# Altium PCB PCB.PcbDoc (part 1 of 3)
Units mm, origin at the board's own origin, x right, y up, seen from the top; angles counter-clockwise.
Board outline 68.58 x 53.34 mm, 4 copper layers (TOP, GND, SIG, BOTTOM), stack 1.586 mm thick; 257 components, 121 nets, 724 pads, 316 vias.
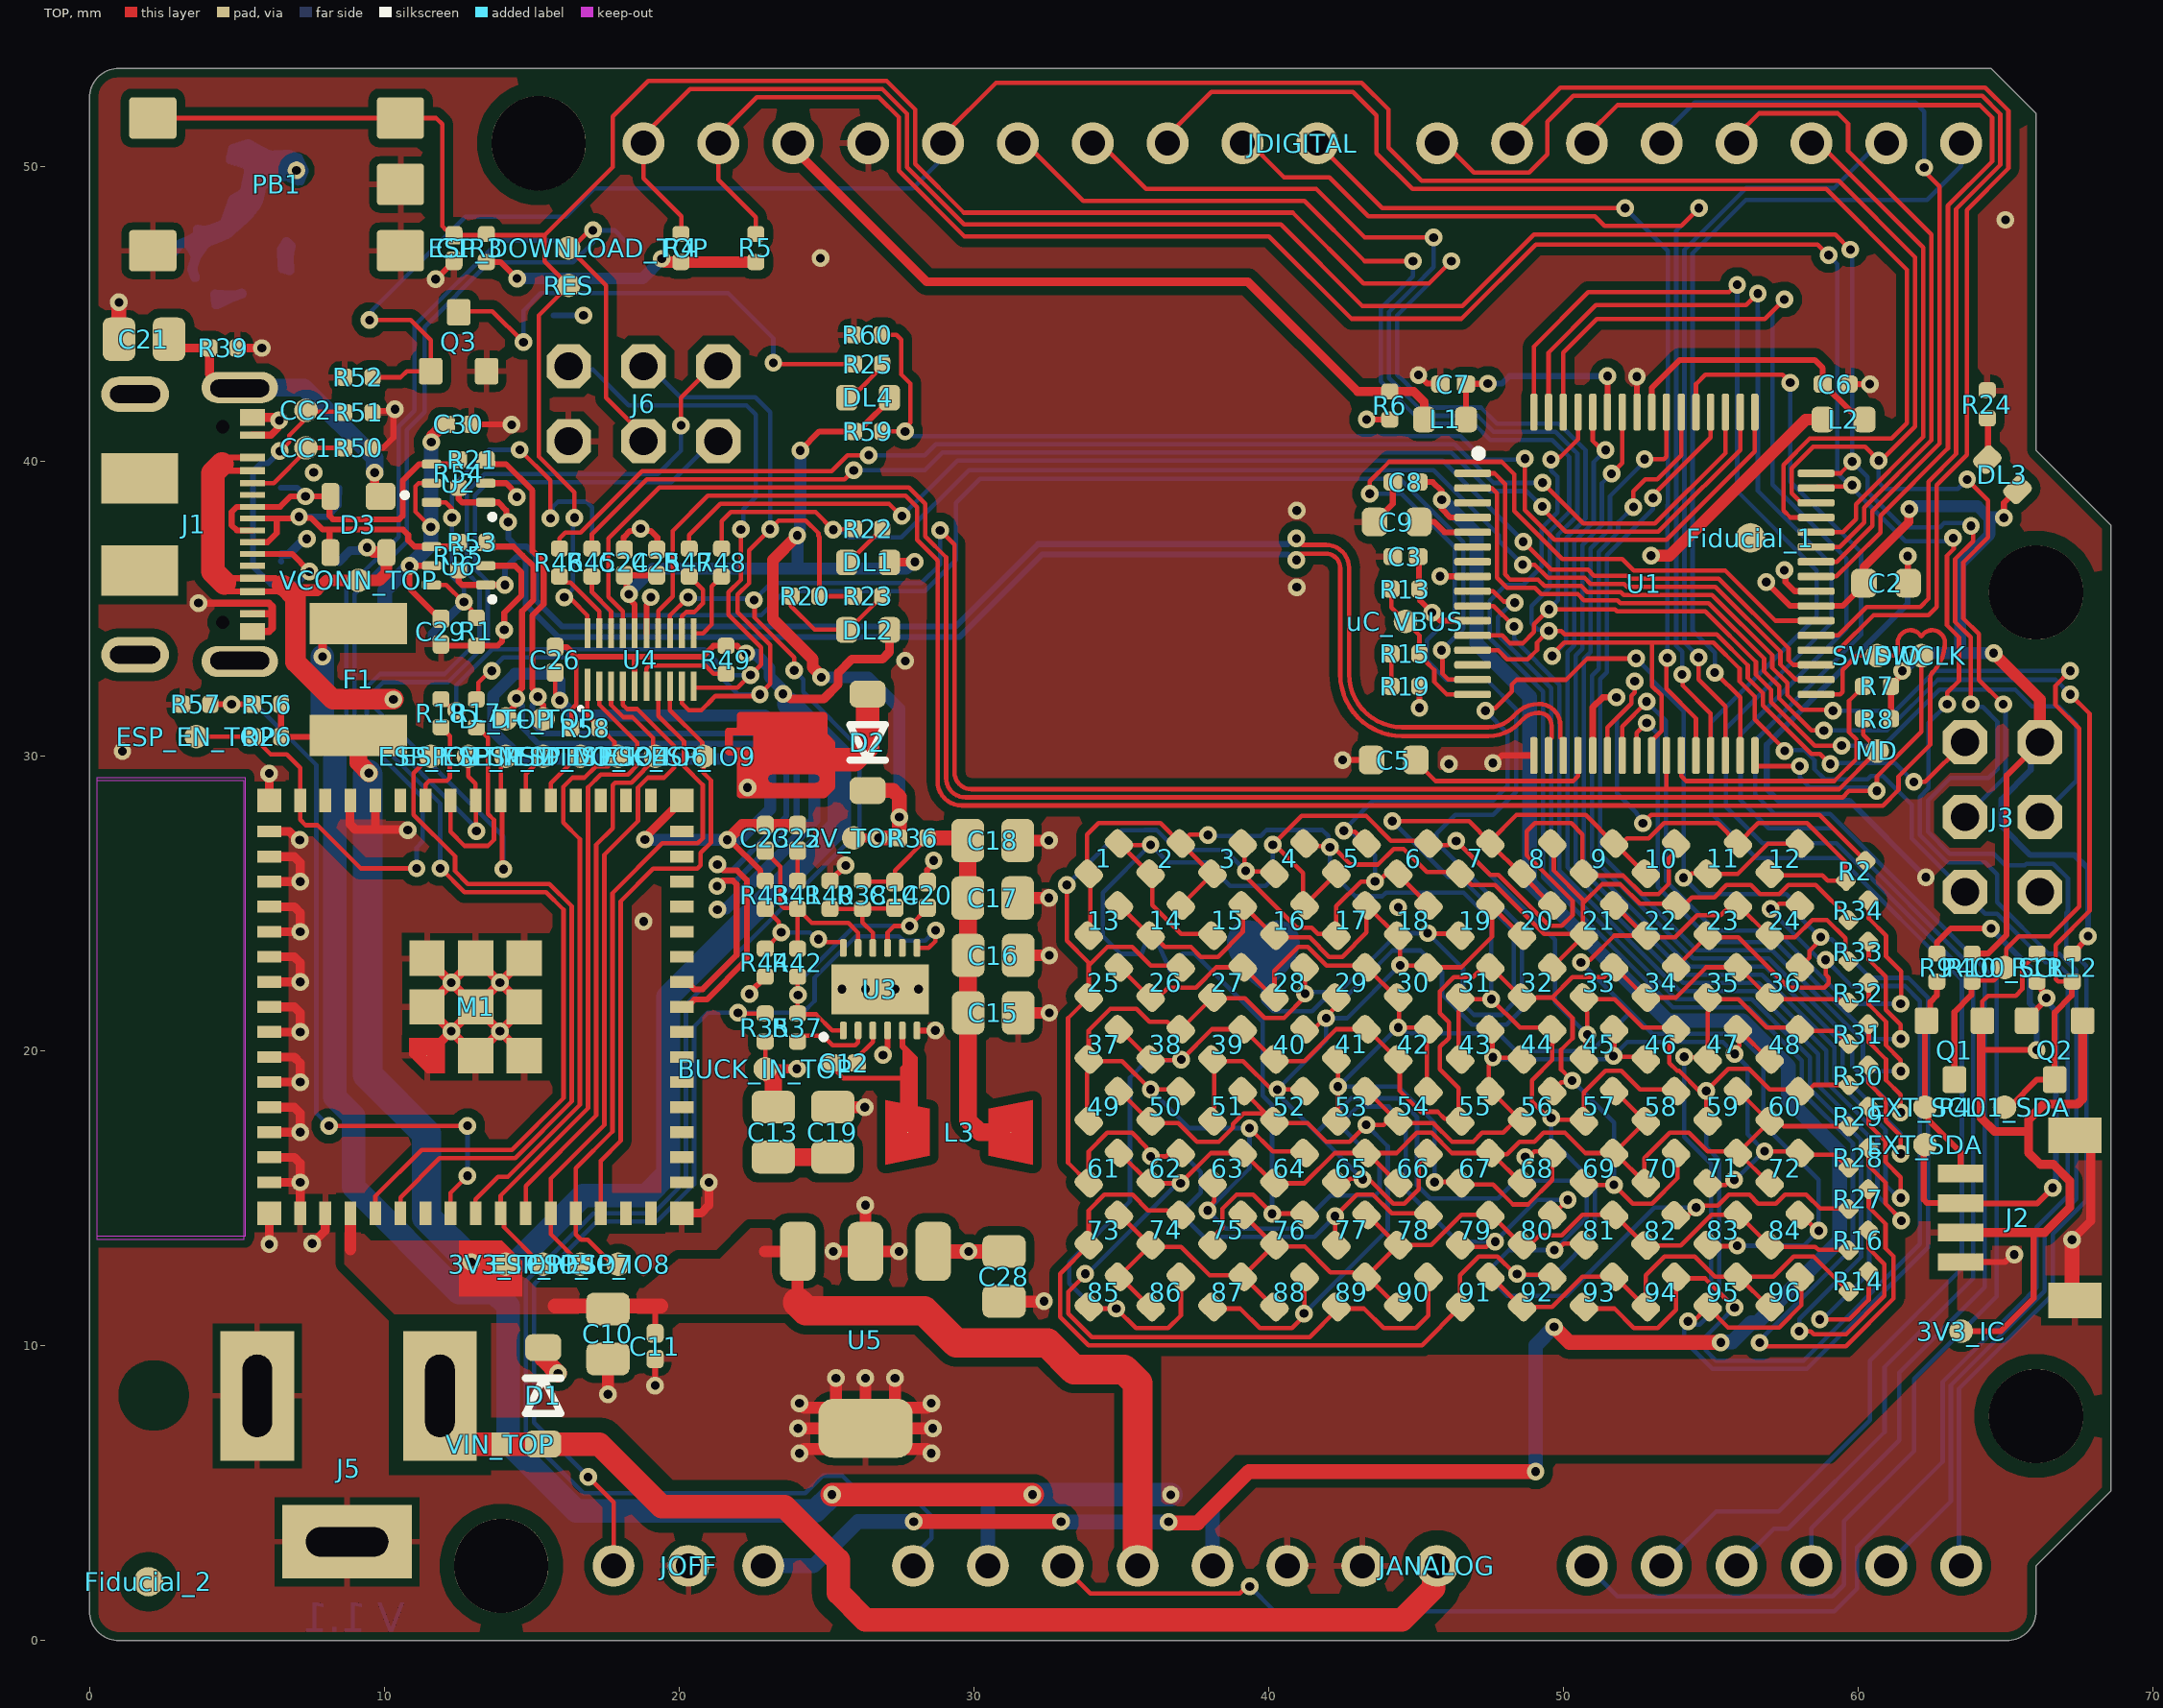
[diagram p0: TOP view]
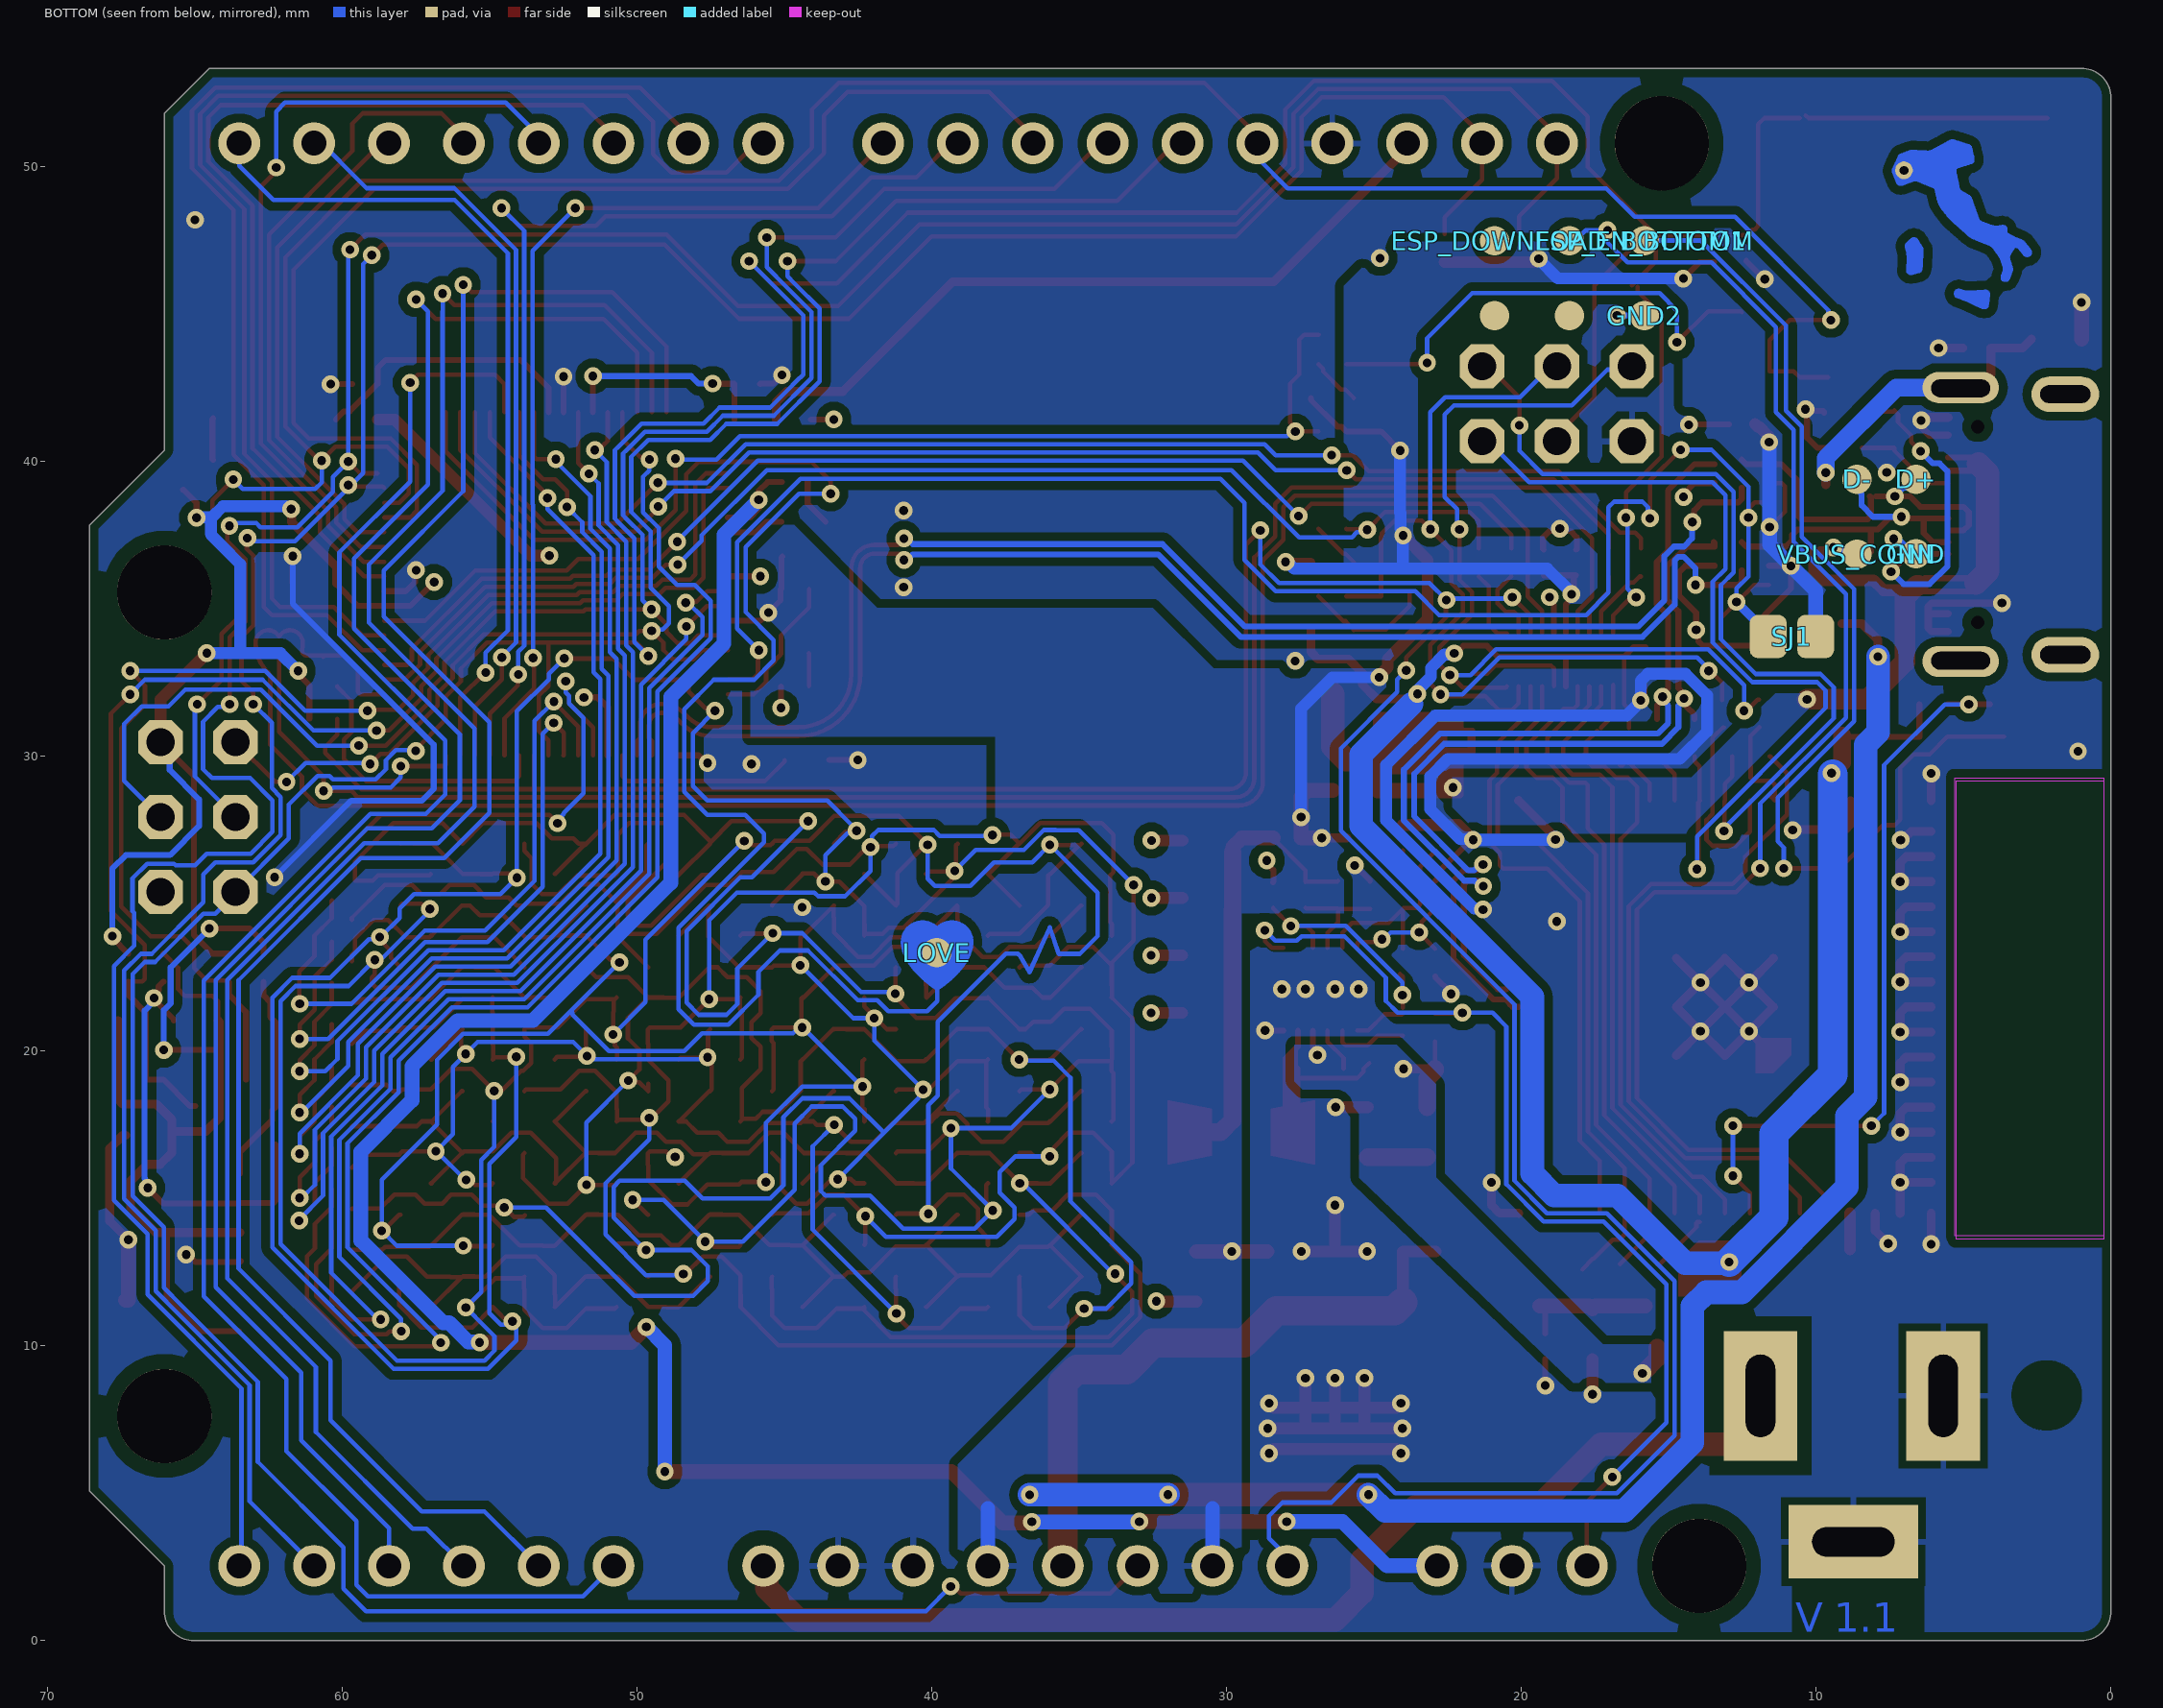
[diagram p1: BOTTOM view, seen from below]
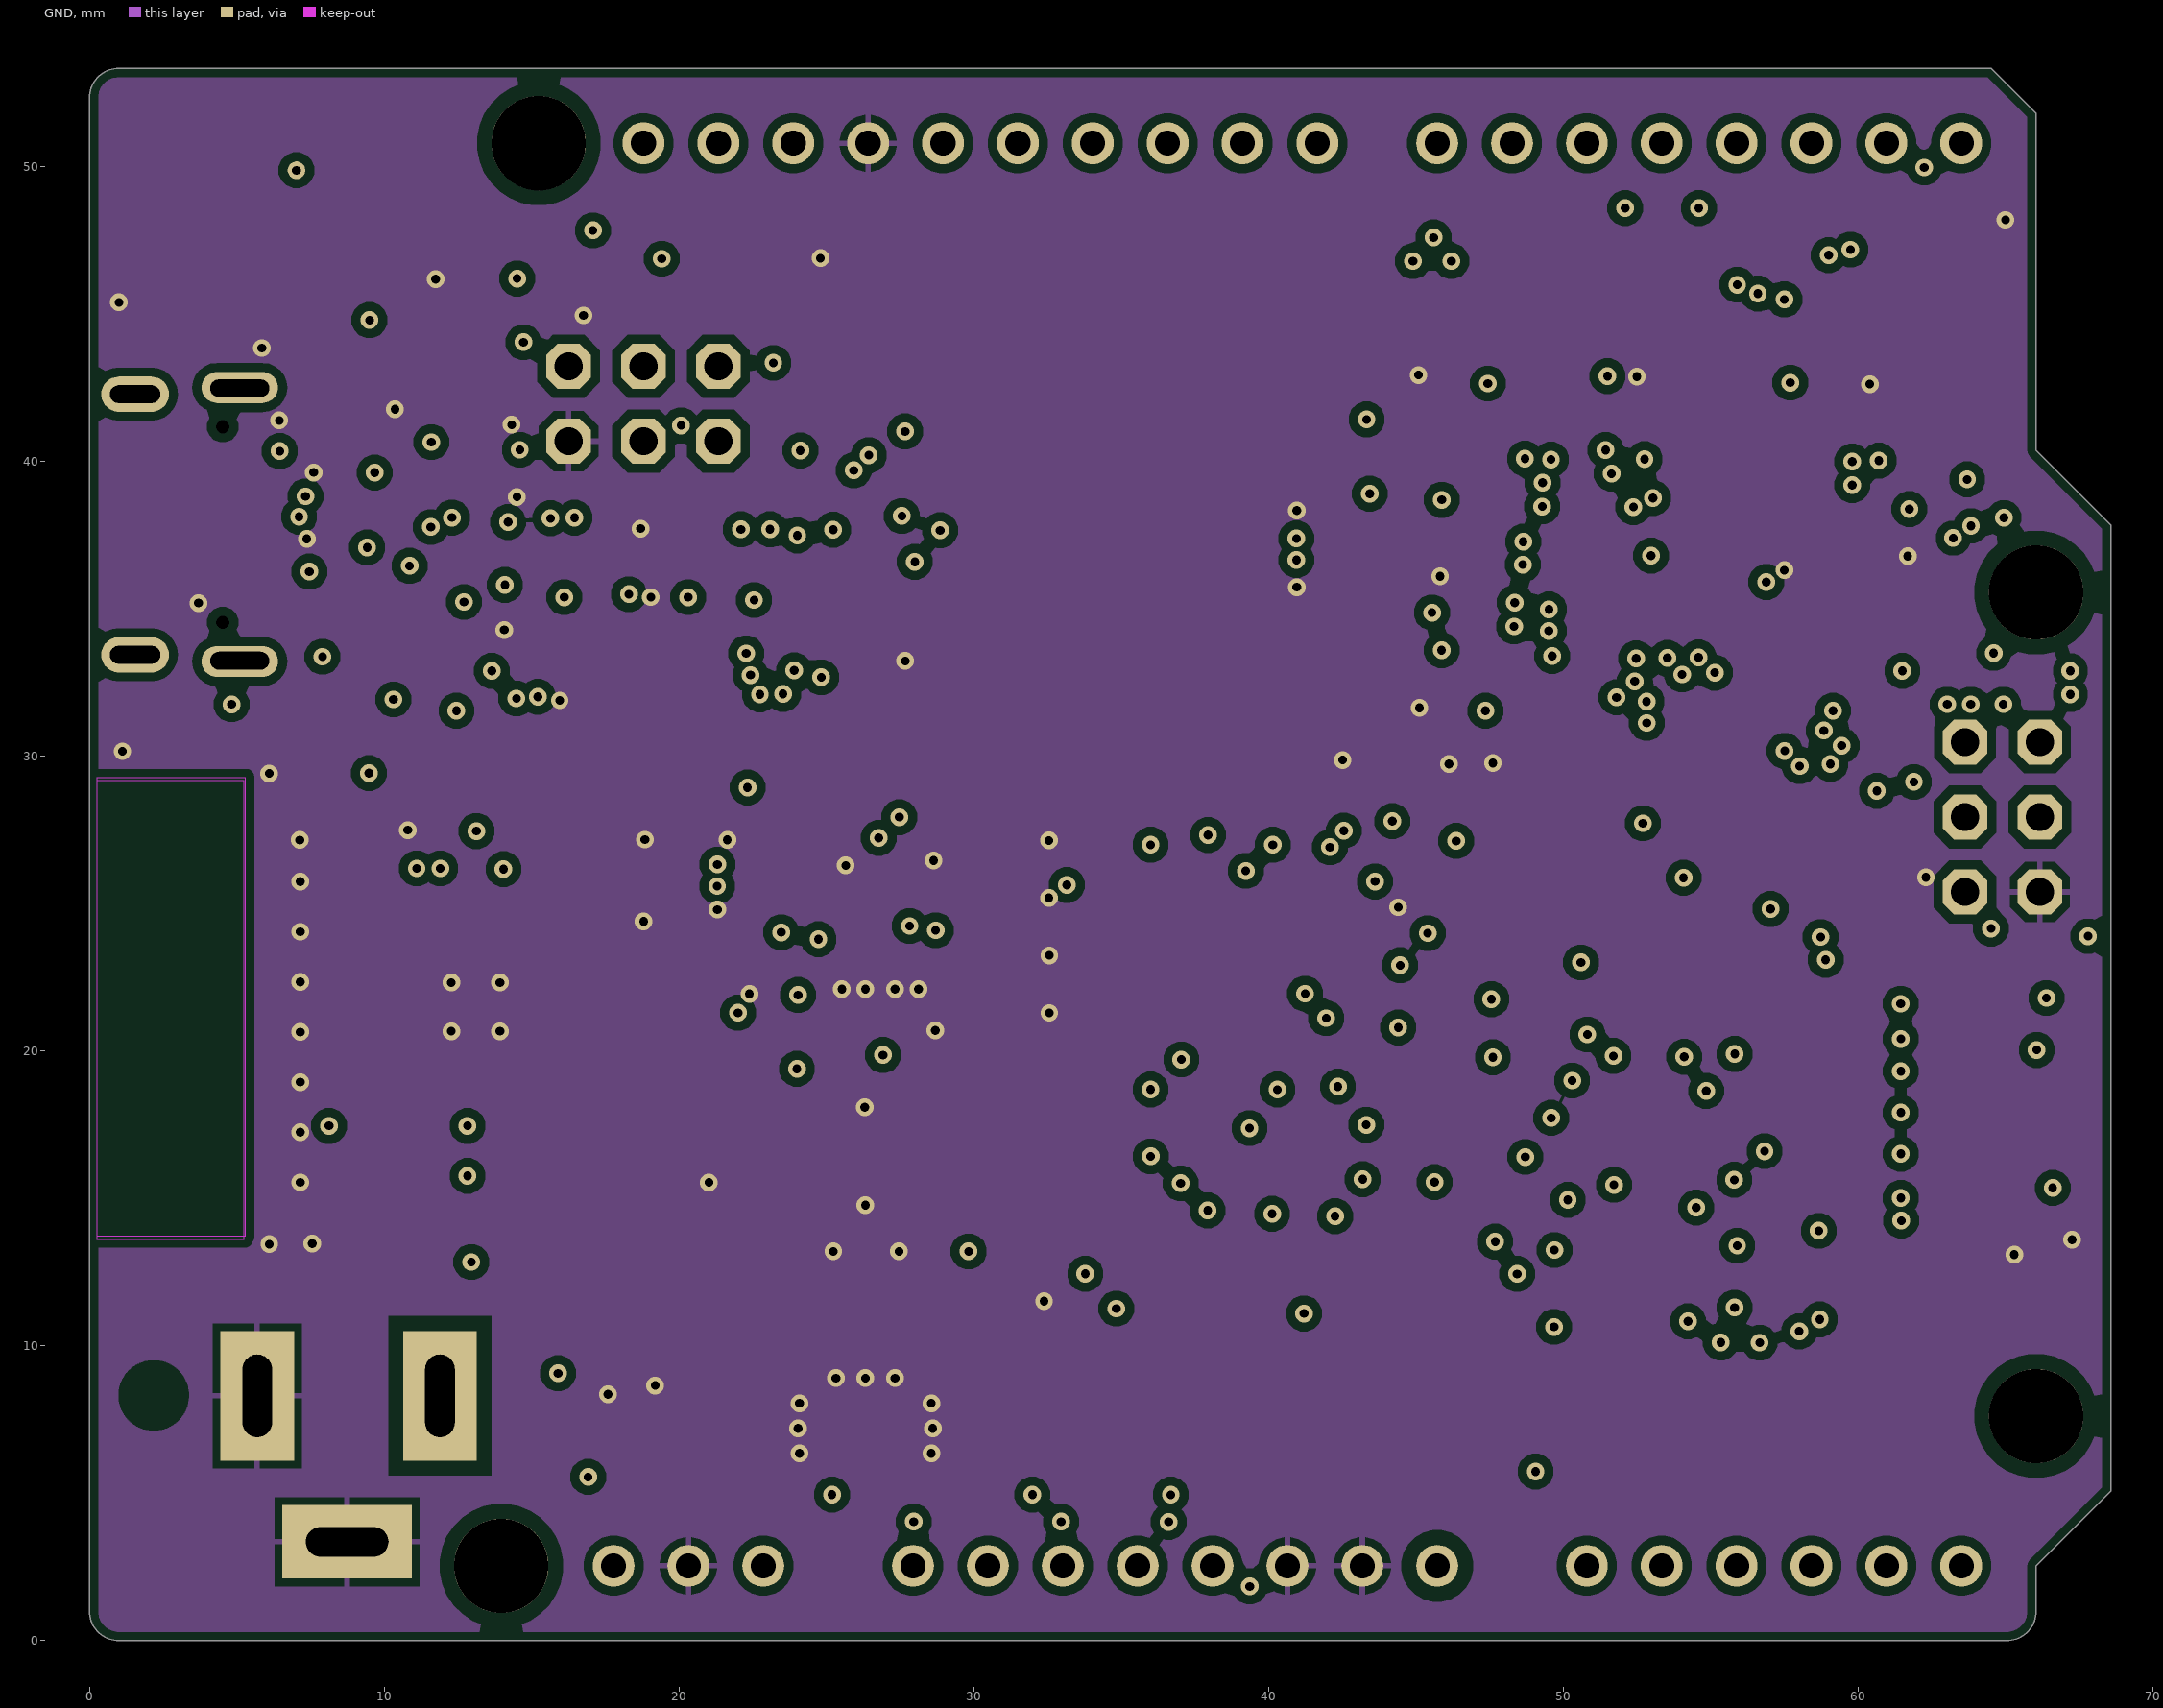
[diagram p2: GND]
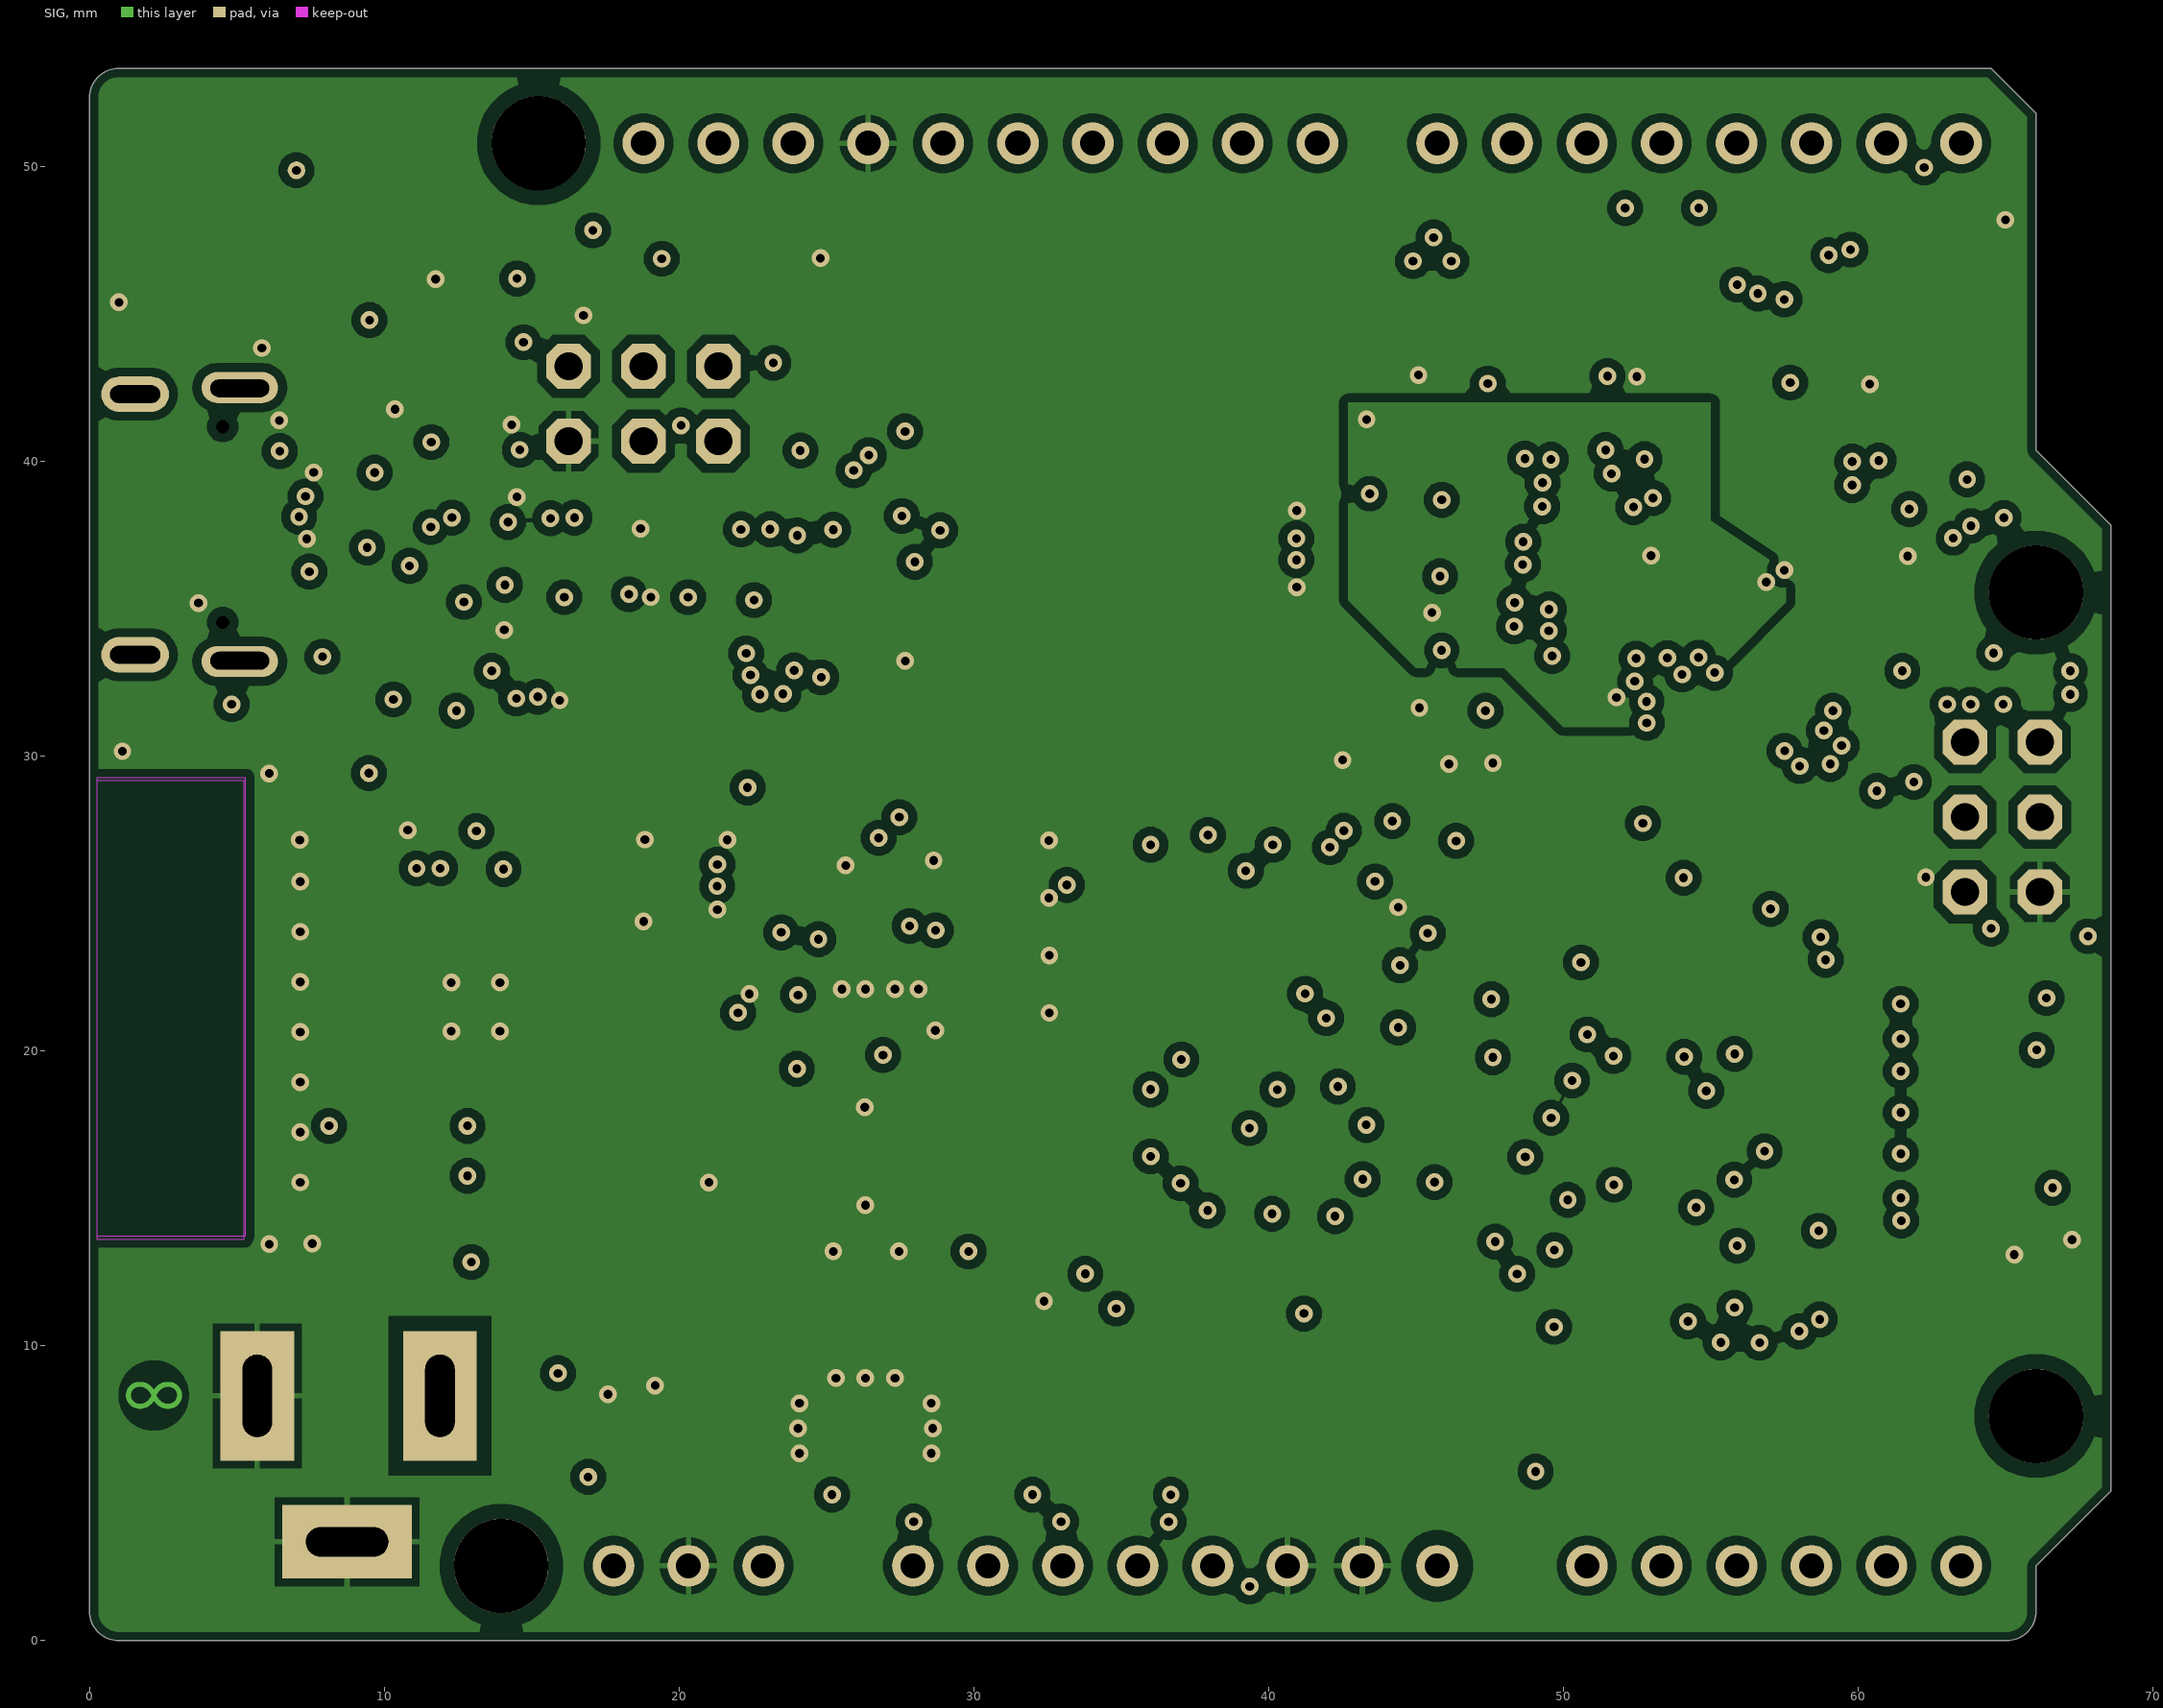
[diagram p3: SIG]

## Layer stack, top to bottom
Top Solder: solder mask 0.0102, Solder Resist, Dk 3.5
TOP: signal copper 0.018
Dielectric 1: prepreg 0.14, PP-014, Dk 4.2
GND: signal copper 0.035
Dielectric2: core 1.2, FR-4, Dk 4.8
SIG: signal copper 0.035
Dielectric3: prepreg 0.14, PP-014, Dk 4.2
BOTTOM: signal copper 0.018
Bottom Solder: solder mask 0.0102, Solder Resist, Dk 3.5

## Board outline
0,1 0,52.34 cw(c1,52.34) 1,53.34 64.516,53.34 66.04,51.816 66.04,40.386 68.58,37.846 68.58,5.08 66.04,2.54 66.04,1 cw(c65.04,1) 65.04,0 1,0 cw(c1,1)

## Design rules (kind name [scope] priority, off if disabled: settings)
BoardOutlineClearance QWIC [(Name = 'J2-FIX')          OR            (Name = 'J2-FIX')] p1: gap=0 ignorepadtopadclearanceinfootprint=FALSE
BoardOutlineClearance Silks [(OnLayer('Top Overlay') OR OnLayer('Bottom Overlay'))] p2: gap=0 ignorepadtopadclearanceinfootprint=FALSE
BoardOutlineClearance [All] p3: gap=0.3 ignorepadtopadclearanceinfootprint=FALSE
Clearance ArduinoSymbolLayerCopper [(ObjectKind = 'Region') And (Net = 'No Net') And (Area = '1.358 sq.')] p1: gap=0.15 ignorepadtopadclearanceinfootprint=FALSE
Clearance MH [(ObjectKind = 'Pad') And (Name = 'Free-MH')] p2: gap=0.5 ignorepadtopadclearanceinfootprint=FALSE
Clearance COPPER_0.3mm_VIN [InNet('GND') vs InNet('VIN')] p3: gap=0.5 ignorepadtopadclearanceinfootprint=TRUE except(0.127: Arc-Arc Arc-Track Arc-SMDPad Arc-THPad Arc-Via Arc-Text Arc-Hole Track-Track Track-SMDPad Track-THPad Track-Via Track-Text Track-Hole SMDPad-SMDPad SMDPad-THPad SMDPad-Via SMDPad-Text SMDPad-Hole THPad-THPad THPad-Via THPad-Text THPad-Hole Via-Via Via-Text Via-Hole Fill-Hole Poly-Hole Region-Hole Text-Text Text-Hole)
Clearance COPPER_0.3mm [All] p4: gap=0.127 ignorepadtopadclearanceinfootprint=FALSE except(0.3: Arc-Fill Arc-Poly Arc-Region Track-Fill Track-Poly Track-Region SMDPad-Fill SMDPad-Poly SMDPad-Region THPad-Fill THPad-Poly THPad-Region Via-Fill Via-Poly Via-Region Fill-Fill Fill-Poly Fill-Region Poly-Poly Poly-Region Region-Region)
Clearance "Generic clearance 0.15mm" [All] p5: gap=0.15 ignorepadtopadclearanceinfootprint=FALSE
ComponentClearance TP [(ObjectKind = 'Component') And (Footprint = 'TP-0.8MM') vs (ObjectKind = 'Component') And (Footprint = 'TP-0.8MM')] p1: gap=0.1 collisioncheckmode=3 verticalgap=0.254 showdistances=FALSE
ComponentClearance Fiducial [InComponent('Fiducial_1') vs InComponent('U1')] p2: gap=-30 collisioncheckmode=3 verticalgap=-30 showdistances=FALSE
ComponentClearance TP2 [InComponent('F1') vs InComponent('ESP_IO1')] p3: gap=-30 collisioncheckmode=3 verticalgap=-30 showdistances=FALSE
ComponentClearance SwitchUSB_0R [( (Comment = 'NLASB3157DFT2G') OR (Name = 'R21') OR (Name = 'R54') OR (Name = 'R53') OR (Name = 'R55')   ) vs ( (Comment = 'NLASB3157DFT2G') OR (Name = 'R21') OR (Name = 'R54') OR (Name = 'R53') OR (Name = 'R55')   )] p4: gap=-30 collisioncheckmode=3 verticalgap=-30 showdistances=FALSE
ComponentClearance [All] p5: gap=0.2 collisioncheckmode=3 verticalgap=0 showdistances=TRUE
DiffPairsRouting USB [InDifferentialPairClass('USB')] p1: maxlimit=0.254 minlimit=0.15 mostfreqgap=0.254 toplayer_maxgap=0.15 toplayer_prefgap=0.15 toplayer_minwidth=0.15 toplayer_maxwidth=0.21 toplayer_prefwidth=0.2 midlayer2_mingap=0.24 midlayer2_maxgap=0.24 midlayer2_prefgap=0.24 midlayer2_minwidth=0.15 midlayer2_maxwidth=0.15 midlayer2_prefwidth=0.15 bottomlayer_maxgap=0.15 bottomlayer_prefgap=0.15 bottomlayer_minwidth=0.15 bottomlayer_maxwidth=0.21 bottomlayer_prefwidth=0.2 impedanceprofiledriven=TRUE impedanceprofileid={E6B00C31-4C8E-439C-824F-D2B2CDC26F9C} impedanceprofilevalue=90.000000 maxuncoupledlength=12.7
Height [All] p1: minheight=0 maxheight=30 prefheight=12.7
HoleSize [All] p1: absolutevalues=TRUE maxlimit=30 minlimit=0.3 maxpercent=80.000 minpercent=20.000
HoleToHoleClearance [All] p1: gap=0.25 allowstackedmicrovias=FALSE
MinimumAnnularRing [All] p1: minimumring=0.15
PlaneConnect [All] p1: pad.planeconnectstyle=Relief pad.reliefexpansion=0.508 pad.reliefentries=4 pad.reliefconductorwidth=0.254 pad.reliefairgap=0.254 via.planeconnectstyle=Direct via.reliefexpansion=0.508 via.reliefentries=4 via.reliefconductorwidth=0.254 via.reliefairgap=0.254
PolygonConnect [All] p1: thpad.connectstyle=Relief thpad.reliefconductorwidth=0.2 thpad.reliefentries=4 thpad.polygonreliefangle="90 Angle" thpad.airgapwidth=0.254 smdpad.connectstyle=Relief smdpad.reliefconductorwidth=0.2 smdpad.reliefentries=4 smdpad.polygonreliefangle="90 Angle" smdpad.airgapwidth=0.254 via.connectstyle=Direct via.reliefconductorwidth=0.254 via.reliefentries=4 via.polygonreliefangle="90 Angle" via.airgapwidth=0.254
RoomDefinition designers_2 [False vs False] p1: confinementstyle=ConfineIn formatcopy=TRUE lockcomponents=FALSE outline 2.05,52 8.597,52 8.597,44.255 2.05,44.255
RoomDefinition designers_1 [False vs False] p2: confinementstyle=ConfineIn formatcopy=TRUE lockcomponents=FALSE outline 0.4,10.2 4,10.2 4,5.8 0.4,5.8
RoomDefinition U_LEDMATRIX [InComponentClass('U_LEDMATRIX')] p3: confinementstyle=ConfineIn formatcopy=TRUE lockcomponents=FALSE outline 69.6,2 81.3,2 81.3,6.4 69.6,6.4
RoomDefinition TOP [InComponentClass('TOP')] p4: confinementstyle=ConfineIn formatcopy=TRUE lockcomponents=FALSE outline 69.7,0.4 75.1,0.4 75.1,12.7 69.7,12.7
RoutingVias StandardVias [All] p1: holewidth=0.3 width=0.6 viastyle="Through Hole" minholewidth=0.3 minwidth=0.6 maxholewidth=0.3 maxwidth=0.6
ShortCircuit SolderJumper [Component = 'SJ2' vs (InNet('VCC') OR InNet('NetL3_1'))] p1: allowed=TRUE
ShortCircuit [All] p2: allowed=FALSE
SilkToSilkClearance [All] p1: silktosilkclearance=0.2
SilkToSolderMaskClearance [IsPad] p1: minsilkscreentomaskgap=0.15 clearancetoexposedcopper=TRUE
SolderMaskExpansion VIAtented [IsVia] p1: expansion=0.102 istentingtop=TRUE
SolderMaskExpansion [All] p2: expansion=0.05 istentingtop=FALSE
UnConnectedPin [All] p1:
UnRoutedNet italy [NOT (WithinRoom('designers_2') OR WithinRoom('designers_1'))] p1:
ViasUnderSMD ViasUnderSMD_1 [HasFootprint('QFN0P300X400X100_HS-13L')] p1: allowed=TRUE
ViasUnderSMD [All] p2: allowed=FALSE
Width StandardTraces [All] p1: maxlimit=5 minlimit=0.15 preferedwidth=0.15 minimp=50.000000 maximp=50.000000 favimp=50.000000
20 further rules are at their usual default settings.

## Classes and differential pairs
net class espSIDE: ESP_IO4_1 ESP_IO5_1 ESP_IO6_1 ESP_IO7_1 ESP_IO8_1 ESP_IO9_1 ESP_RXD0_1 ESP_TXD0_1
net class DIGITAL: AREF_1 P100_AN22_SCL_1 P101_AN21_SDA_1 P102_SPI0_RSPCK_GPT2_B_CAN0_RX_1 P103_SPI0_SSL_GPT2_A_CAN0_TX_1 P104_IRQ01_GPT1_B_1 P105_IRQ00_GPT1_A_1 P106_GPT0_B_1 P107_GPT0_A_1 P111_GPT3_A_1 P112_GPT3_B_1 P301_SCI2_RXD_1 P302_SCI2_TXD_1 P303_GPT7_B_1 P304_GPT7_A_1 P410_SPI0_MISO_GPT6_B_1 P411_SPI0_MOSI_GPT6_A_1
net class ucSIDE: MD_1 P108_SWDIO_1 P109_SCI9_TXD_1 P110_SCI9_RXD_1 P300_SWCLK_1 P501_SCI1_TXD_1 P502_SCI1_RXD_1 R\E\S\E\T\_1
component class U_LEDMATRIX: 1 2 3 4 5 6 7 8 9 10 11 12 13 14 15 16 17 18 19 20 21 22 23 24 25 26 27 28 29 30 31 32 33 34 35 36 37 38 39 40 41 42 43 44 45 46 47 48 49 50 51 52 53 54 55 56 57 58 59 60 61 62 63 64 65 66 67 68 69 70 71 72 73 74 75 76 77 78 79 80 81 82 83 84 85 86 87 88 89 90 91 92 93 94 95 96 R2 R14 R16 R27 R28 R29 R30 R31 R32 R33 R34
differential pair class USB: EP_1 ESP_1 RA4_1 USB_D_1 USB_REN_D_1
component class TOP: 3V3_IC 3V3_TOP 5V_TOP BUCK_IN_TOP C1 C2 C3 C5 C6 C7 C8 C9 C10 C11 C12 C13 C14 C15 C16 C17 C18 C19 C20 C21 C22 C23 C24 C25 C26 C28 C29 C30 CC1 CC2 D1 D2 D3 D+ D+_TOP D- D-_TOP DL1 DL2 DL3 DL4 ESP_DOWNLOAD_BOTTOM1 ESP_DOWNLOAD_TOP ESP_EN_BOTTOM ESP_EN_BOTTOM1 ESP_EN_TOP ESP_EN_TOP1 ESP_IO1 ESP_IO4 ESP_IO5 ESP_IO6 ESP_IO7 ESP_IO8 ESP_IO9 ESP_MTCK ESP_MTDI ESP_MTDO ESP_MTMS EXT_SCL EXT_SDA F1 Fiducial_1 Fiducial_2 GND GND2 J1 J2 J3 J5 J6 JANALOG JDIGITAL JOFF L1 L2 L3 LOVE M1 MD P400_SCL P401_SDA PB1 Q1 Q2 Q3 R1 R3 R4 R5 R6 R7 R8 R9 R10 R11 R12 R13 R15 R17 R18 R19 R20 R21 R22 R23 R24 R25 R26 R35 R36 R37 R38 R39 R40 R41 R42 R43 R44 R45 R46 R47 R48 R49 R50 R51 R52 R53 R54 R55 R56 R57 R58 R59 R60 RES SJ1 SWCLK SWDIO U1 U2 U3 U4 U5 U6 uC_VBUS VBUS_CONN VCONN_TOP VIN_TOP
differential pair RA4_1: +RA4_1_P -RA4_1_N
differential pair ESP_1: +ESP_1_P -ESP_1_N
differential pair USB_D_1: +USB_D_1_P -USB_D_1_N

## Components (designator, comment, footprint, x,y, rotation, side; value= is the part's Value field where it differs from the comment)
1 "XHY-STB0603SR" LEDC1608X80N-AK#1 34.412,26.531 r225 top
2 "XHY-STB0603SR" LEDC1608X80N-AK#1 36.512,26.531 r225 top
3 "XHY-STB0603SR" LEDC1608X80N-AK#1 38.612,26.531 r225 top
3V3_IC "CMP-018-0004-A.4" TP-0.8MM#1 63.5,10.5 r90 top
3V3_TOP "CMP-018-0004-A.4" TP-0.8MM#2 14.125,12.775 r180 top
4 "XHY-STB0603SR" LEDC1608X80N-AK#1 40.712,26.531 r225 top
5 "XHY-STB0603SR" LEDC1608X80N-AK#1 42.812,26.531 r225 top
5V_TOP "CMP-018-0004-A.4" TP-0.8MM#1 25.925,27.235 r180 top
6 "XHY-STB0603SR" LEDC1608X80N-AK#1 44.912,26.531 r225 top
7 "XHY-STB0603SR" LEDC1608X80N-AK#1 47.012,26.531 r225 top
8 "XHY-STB0603SR" LEDC1608X80N-AK#1 49.112,26.531 r225 top
9 "XHY-STB0603SR" LEDC1608X80N-AK#1 51.212,26.531 r225 top
10 "XHY-STB0603SR" LEDC1608X80N-AK#1 53.312,26.531 r225 top
11 "XHY-STB0603SR" LEDC1608X80N-AK#1 55.412,26.531 r225 top
12 "XHY-STB0603SR" LEDC1608X80N-AK#1 57.512,26.531 r225 top
13 "XHY-STB0603SR" LEDC1608X80N-AK#1 34.412,24.431 r225 top
14 "XHY-STB0603SR" LEDC1608X80N-AK#1 36.512,24.431 r225 top
15 "XHY-STB0603SR" LEDC1608X80N-AK#1 38.612,24.431 r225 top
16 "XHY-STB0603SR" LEDC1608X80N-AK#1 40.712,24.431 r225 top
17 "XHY-STB0603SR" LEDC1608X80N-AK#1 42.812,24.431 r225 top
18 "XHY-STB0603SR" LEDC1608X80N-AK#1 44.912,24.431 r225 top
19 "XHY-STB0603SR" LEDC1608X80N-AK#1 47.012,24.431 r225 top
20 "XHY-STB0603SR" LEDC1608X80N-AK#1 49.112,24.431 r225 top
21 "XHY-STB0603SR" LEDC1608X80N-AK#1 51.212,24.431 r225 top
22 "XHY-STB0603SR" LEDC1608X80N-AK#1 53.312,24.431 r225 top
23 "XHY-STB0603SR" LEDC1608X80N-AK#1 55.412,24.431 r225 top
24 "XHY-STB0603SR" LEDC1608X80N-AK#1 57.512,24.431 r225 top
25 "XHY-STB0603SR" LEDC1608X80N-AK#1 34.412,22.331 r225 top
26 "XHY-STB0603SR" LEDC1608X80N-AK#1 36.512,22.331 r225 top
27 "XHY-STB0603SR" LEDC1608X80N-AK#1 38.612,22.331 r225 top
28 "XHY-STB0603SR" LEDC1608X80N-AK#1 40.712,22.331 r225 top
29 "XHY-STB0603SR" LEDC1608X80N-AK#1 42.812,22.331 r225 top
30 "XHY-STB0603SR" LEDC1608X80N-AK#1 44.912,22.331 r225 top
31 "XHY-STB0603SR" LEDC1608X80N-AK#1 47.012,22.331 r225 top
32 "XHY-STB0603SR" LEDC1608X80N-AK#1 49.112,22.331 r225 top
33 "XHY-STB0603SR" LEDC1608X80N-AK#1 51.212,22.331 r225 top
34 "XHY-STB0603SR" LEDC1608X80N-AK#1 53.312,22.331 r225 top
35 "XHY-STB0603SR" LEDC1608X80N-AK#1 55.412,22.331 r225 top
36 "XHY-STB0603SR" LEDC1608X80N-AK#1 57.512,22.331 r225 top
37 "XHY-STB0603SR" LEDC1608X80N-AK#1 34.412,20.231 r225 top
38 "XHY-STB0603SR" LEDC1608X80N-AK#1 36.512,20.231 r225 top
39 "XHY-STB0603SR" LEDC1608X80N-AK#1 38.612,20.231 r225 top
40 "XHY-STB0603SR" LEDC1608X80N-AK#1 40.712,20.231 r225 top
41 "XHY-STB0603SR" LEDC1608X80N-AK#1 42.812,20.231 r225 top
42 "XHY-STB0603SR" LEDC1608X80N-AK#1 44.912,20.231 r225 top
43 "XHY-STB0603SR" LEDC1608X80N-AK#1 47.012,20.231 r225 top
44 "XHY-STB0603SR" LEDC1608X80N-AK#1 49.112,20.231 r225 top
45 "XHY-STB0603SR" LEDC1608X80N-AK#1 51.212,20.231 r225 top
46 "XHY-STB0603SR" LEDC1608X80N-AK#1 53.312,20.231 r225 top
47 "XHY-STB0603SR" LEDC1608X80N-AK#1 55.412,20.231 r225 top
48 "XHY-STB0603SR" LEDC1608X80N-AK#1 57.512,20.231 r225 top
49 "XHY-STB0603SR" LEDC1608X80N-AK#1 34.412,18.131 r225 top
50 "XHY-STB0603SR" LEDC1608X80N-AK#1 36.512,18.131 r225 top
51 "XHY-STB0603SR" LEDC1608X80N-AK#1 38.612,18.131 r225 top
52 "XHY-STB0603SR" LEDC1608X80N-AK#1 40.712,18.131 r225 top
53 "XHY-STB0603SR" LEDC1608X80N-AK#1 42.812,18.131 r225 top
54 "XHY-STB0603SR" LEDC1608X80N-AK#1 44.912,18.131 r225 top
55 "XHY-STB0603SR" LEDC1608X80N-AK#1 47.012,18.131 r225 top
56 "XHY-STB0603SR" LEDC1608X80N-AK#1 49.112,18.131 r225 top
57 "XHY-STB0603SR" LEDC1608X80N-AK#1 51.212,18.131 r225 top
58 "XHY-STB0603SR" LEDC1608X80N-AK#1 53.312,18.131 r225 top
59 "XHY-STB0603SR" LEDC1608X80N-AK#1 55.412,18.131 r225 top
60 "XHY-STB0603SR" LEDC1608X80N-AK#1 57.512,18.131 r225 top
61 "XHY-STB0603SR" LEDC1608X80N-AK#1 34.412,16.03 r225 top
62 "XHY-STB0603SR" LEDC1608X80N-AK#1 36.512,16.031 r225 top
63 "XHY-STB0603SR" LEDC1608X80N-AK#1 38.612,16.031 r225 top
64 "XHY-STB0603SR" LEDC1608X80N-AK#1 40.712,16.031 r225 top
65 "XHY-STB0603SR" LEDC1608X80N-AK#1 42.812,16.031 r225 top
66 "XHY-STB0603SR" LEDC1608X80N-AK#1 44.912,16.031 r225 top
67 "XHY-STB0603SR" LEDC1608X80N-AK#1 47.012,16.031 r225 top
68 "XHY-STB0603SR" LEDC1608X80N-AK#1 49.112,16.031 r225 top
69 "XHY-STB0603SR" LEDC1608X80N-AK#1 51.212,16.031 r225 top
70 "XHY-STB0603SR" LEDC1608X80N-AK#1 53.312,16.031 r225 top
71 "XHY-STB0603SR" LEDC1608X80N-AK#1 55.412,16.031 r225 top
72 "XHY-STB0603SR" LEDC1608X80N-AK#1 57.512,16.031 r225 top
73 "XHY-STB0603SR" LEDC1608X80N-AK#1 34.412,13.931 r225 top
74 "XHY-STB0603SR" LEDC1608X80N-AK#1 36.512,13.931 r225 top
75 "XHY-STB0603SR" LEDC1608X80N-AK#1 38.612,13.931 r225 top
76 "XHY-STB0603SR" LEDC1608X80N-AK#1 40.712,13.931 r225 top
77 "XHY-STB0603SR" LEDC1608X80N-AK#1 42.812,13.931 r225 top
78 "XHY-STB0603SR" LEDC1608X80N-AK#1 44.912,13.931 r225 top
79 "XHY-STB0603SR" LEDC1608X80N-AK#1 47.012,13.931 r225 top
80 "XHY-STB0603SR" LEDC1608X80N-AK#1 49.112,13.931 r225 top
81 "XHY-STB0603SR" LEDC1608X80N-AK#1 51.212,13.931 r225 top
82 "XHY-STB0603SR" LEDC1608X80N-AK#1 53.3,13.918 r225 top
83 "XHY-STB0603SR" LEDC1608X80N-AK#1 55.412,13.931 r225 top
84 "XHY-STB0603SR" LEDC1608X80N-AK#1 57.512,13.931 r225 top
85 "XHY-STB0603SR" LEDC1608X80N-AK#1 34.412,11.831 r225 top
86 "XHY-STB0603SR" LEDC1608X80N-AK#1 36.512,11.831 r225 top
87 "XHY-STB0603SR" LEDC1608X80N-AK#1 38.612,11.831 r225 top
88 "XHY-STB0603SR" LEDC1608X80N-AK#1 40.712,11.831 r225 top
89 "XHY-STB0603SR" LEDC1608X80N-AK#1 42.812,11.831 r225 top
90 "XHY-STB0603SR" LEDC1608X80N-AK#1 44.912,11.831 r225 top
91 "XHY-STB0603SR" LEDC1608X80N-AK#1 47.012,11.831 r225 top
92 "XHY-STB0603SR" LEDC1608X80N-AK#1 49.112,11.831 r225 top
93 "XHY-STB0603SR" LEDC1608X80N-AK#1 51.212,11.831 r225 top
94 "XHY-STB0603SR" LEDC1608X80N-AK#1 53.312,11.831 r225 top
95 "XHY-STB0603SR" LEDC1608X80N-AK#1 55.412,11.831 r225 top
96 "XHY-STB0603SR" LEDC1608X80N-AK#1 57.512,11.831 r225 top
BUCK_IN_TOP "CMP-018-0004-A.4" TP-0.8MM#1 22.925,19.4 r180 top
C1 "DNP" CAP-0402 12.366,47.244 r270 top
C2 "GRM188R61C475KAAJD" CAP-0603 60.946,35.876 r180 top value=4.7µF
C3 "GRM155R61H104KE19D" CAP-0402 44.646,36.776 r0 top value=100nF
C5 "GRM188R61C475KAAJD" CAP-0603 44.246,29.876 r0 top value=4.7µF
C6 "CL05A105KP5NNNC" CAP-0402 59.235,42.628 r0 top value=1µF
C7 "GRM155R61H104KE19D" CAP-0402 46.265,42.628 r0 top value=100nF
C8 "GRM155R61H104KE19D" CAP-0402 44.65,39.306 r0 top value=100nF
C9 "GRM188R61C475KAAJD" CAP-0603 44.35,37.953 r0 top value=4.7µF
C10 "CL21A226MAQNNNE" CAP-0805 17.59,10.406 r90 top value=22µF
C11 "GRM155R61H104KE19D" CAP-0402 19.19,9.991 r90 top value=100nF
C12 "GRM155R61H104KE19D" CAP-0402 25.6,19.6 r0 top value=100nF
C13 "CL21A226MAQNNNE" CAP-0805 23.199,17.253 r90 top value=22µF
C14 "GRM1555C1H330JA01D" CAP-0402 27.325,25.3 r90 top value=33pF
C15 "CL21A226MAQNNNE" CAP-0805 30.66,21.298 r180 top value=22µF
C16 "CL21A226MAQNNNE" CAP-0805 30.66,23.248 r180 top value=22µF
C17 "CL21A226MAQNNNE" CAP-0805 30.645,25.196 r180 top value=22µF
C18 "CL21A226MAQNNNE" CAP-0805 30.645,27.146 r180 top value=22µF
C19 "CL21A226MAQNNNE" CAP-0805 25.216,17.253 r270 top value=22µF
C20 "CL05A105KP5NNNC" CAP-0402 28.425,25.3 r90 top value=1µF
C21 "FV21X472K102ECG" CAP-0805 1.85,44.153 r0 top value=4.7nF
C22 "GRM155R71H102KA01D" CAP-0402 24.025,27.235 r270 top value=1nF
C23 "CC0402JRNPO9BN101" CAP-0402 22.925,27.235 r270 top value=100pF
C24 "CL05A105KP5NNNC" CAP-0402 18.146,36.576 r270 top value=1µF
C25 "GRM155R61H104KE19D" CAP-0402 19.246,36.576 r270 top value=100nF
C26 "GRM155R61H104KE19D" CAP-0402 15.796,33.276 r90 top value=100nF
C28 "CL21A226MAQNNNE" CAP-0805 31.025,12.356 r90 top value=22µF
C29 "GRM155R61H104KE19D" CAP-0402 11.925,34.231 r90 top value=100nF
C30 "GRM155R61H104KE19D" CAP-0402 12.525,41.266 r180 top value=100nF
CC1 "CMP-018-0004-A.4" TP-0.8MM#1 7.35,40.466 r180 top
CC2 "CMP-018-0004-A.4" TP-0.8MM#1 7.35,41.736 r180 top
D1 "PMEG6020AELRX" SOD123-1 15.395,8.306 r270 top
D2 "PMEG6020AELRX" SOD123-1 26.396,30.476 r90 top
D3 "PRTR5V0U2X,215" SOT190P230X110-4N 9.125,37.866 r180 top
D+ "CMP-018-0005-A.3" TP-1.00MM#1 6.615,39.4 r180 bottom
D+_TOP "CMP-018-0004-A.4" TP-0.8MM#1 15.395,31.27 r180 top
D- "CMP-018-0005-A.3" TP-1.00MM#1 8.615,39.4 r180 bottom
D-_TOP "CMP-018-0004-A.4" TP-0.8MM#1 14.125,31.27 r180 top
DL1 "KPT-1608YC" LEDC1608X80N-AK#1 26.416,36.576 r0 top
DL2 "KPT-1608YC" LEDC1608X80N-AK#1 26.416,34.29 r0 top
DL3 "HSMG-C190" LEDC1608X80N-AK#2 64.897,39.553 r315 top
DL4 "KPT-1608YC" LEDC1608X80N-AK#1 26.416,42.164 r0 top
ESP_DOWNLOAD_BOTTOM1 "CMP-018-0005-A.3" TP-1.00MM#2 18.375,47.49 r0 bottom
ESP_DOWNLOAD_TOP "CMP-018-0004-A.4" TP-0.8MM#1 16.256,47.244 r180 top
ESP_EN_BOTTOM "CMP-018-0005-A.3" TP-1.00MM#2 15.835,47.49 r180 bottom
ESP_EN_TOP "CMP-018-0004-A.4" TP-0.8MM#1 3.625,30.666 r180 top
ESP_IO1 "CMP-018-0004-A.4" TP-0.8MM#1 11.585,30 r180 top
ESP_IO4 "CMP-018-0004-A.4" TP-0.8MM#1 17.935,30 r90 top
ESP_IO5 "CMP-018-0004-A.4" TP-0.8MM#1 15.395,12.775 r90 top
ESP_IO6 "CMP-018-0004-A.4" TP-0.8MM#1 19.205,30 r90 top
ESP_IO7 "CMP-018-0004-A.4" TP-0.8MM#1 16.665,12.775 r90 top
ESP_IO8 "CMP-018-0004-A.4" TP-0.8MM#1 17.935,12.775 r90 top
ESP_IO9 "CMP-018-0004-A.4" TP-0.8MM#1 20.825,30 r90 top
ESP_MTCK "CMP-018-0004-A.4" TP-0.8MM#1 16.665,30 r180 top
ESP_MTDI "CMP-018-0004-A.4" TP-0.8MM#1 14.125,30 r180 top
ESP_MTDO "CMP-018-0004-A.4" TP-0.8MM#1 15.395,30 r180 top
ESP_MTMS "CMP-018-0004-A.4" TP-0.8MM#1 12.855,30 r180 top
EXT_SCL "CMP-018-0004-A.4" TP-0.8MM#1 62.27,18.096 r90 top
EXT_SDA "CMP-018-0004-A.4" TP-0.8MM#1 62.27,16.826 r90 top
F1 "MF-MSMF050-2-W2" 1812 9.125,32.603 r270 top
Fiducial_1 "Fiducial mark 1mm with 2mm solder" "Fiducial mark 1mm with circle-Footprint-1" 56.35,37.416 r90 top
Fiducial_2 "Fiducial mark 1mm with 2mm solder" "Fiducial mark 1mm with circle-Footprint-1" 2,2 r90 top
GND "CMP-018-0005-A.3" TP-1.00MM#1 6.615,36.875 r90 bottom
GND2 "CMP-018-0005-A.3" TP-1.00MM#2 15.835,44.95 r90 bottom
J1 "CX90B-16P" CX90B-16P-Footprint-1 3.538,37.866 r270 top
J2 "SM04B-SRSS-TB(LF)(SN)" SM04B-SRSS-TB(LF)(SN)-Footprint-1 65.42,14.346 r270 top locked
J3 "PH2-06-UA" 2X03 64.897,27.94 r90 top locked
J5 "19TW-746" POWERSUPPLY_DC-21MM 5.69,8.306 r0 top locked
J6 "PH2-06-UA" 2X03 18.796,41.964 r0 top
JANALOG "20TW-995" 1X14-CUSTOM 45.72,2.54 r0 top locked
JDIGITAL "20TW-994" 1X18-CUSTOM 45.72,50.8 r180 top locked
JOFF "21TW-204" 21TW-204 20.32,2.54 r0 top
L1 "BLM18PG471SN1D" L-0603 45.99,41.428 r0 top
L2 "BLM18PG471SN1D" L-0603 59.51,41.428 r0 top
L3 "PMF42-103MN" PMF42 29.508,17.248 r0 top
LOVE "CMP-018-0005-A.3" TP-1.00MM#2 39.838,23.34 r90 bottom
M1 "ESP32-S3-MINI-1-N8" ESP32-S3-MINI-1-N8 13.1,21.5 r90 top locked
MD "CMP-018-0004-A.4" TP-0.8MM#1 60.646,30.176 r180 top
P400_SCL "CMP-018-0004-A.4" TP-0.8MM#1 64.97,22.834 r180 top
P401_SDA "CMP-018-0004-A.4" TP-0.8MM#1 64.97,18.095 r180 top
PB1 "1571636-3" TS42 6.35,49.403 r0 top locked
Q1 "2N7002KT1G" SOT23 63.27,20.034 r180 top
Q2 "2N7002KT1G" SOT23 66.67,20.034 r180 top
Q3 "2N7002KT1G" SOT23 12.525,44.066 r0 top
R1 "CRCW0402100KFKEDC" RES-0402 13.125,34.231 r90 top value=100k
R2 "CRCW0402330RJNED" RES-0402 59.921,26.112 r45 top value=330
R3 "CRCW0402100KFKEDC" RES-0402 13.466,47.244 r270 top value=100k
R4 "RC0402FR-075K1L" RES-0402 20.066,47.244 r270 top value=5.1k
R5 "RC0402FR-075K1L" RES-0402 22.606,47.244 r270 top value=5.1k
R6 "RC0402FR-075K1L" RES-0402 44.115,41.903 r270 top value=5.1k
R7 "RC0402FR-075K1L" RES-0402 60.646,32.376 r180 top value=5.1k
R8 "RC0402FR-075K1L" RES-0402 60.646,31.276 r180 top value=5.1k
R9 "RC0402FR-075K1L" RES-0402 62.67,22.834 r270 top value=5.1k
R10 "RC0402FR-075K1L" RES-0402 63.87,22.834 r270 top value=5.1k
R11 "RC0402FR-075K1L" RES-0402 66.07,22.834 r270 top value=5.1k
R12 "RC0402FR-075K1L" RES-0402 67.27,22.834 r270 top value=5.1k
R13 "RC0402FR-075K1L" RES-0402 44.646,35.676 r180 top value=5.1k
R14 "CRCW0402330RJNED" RES-0402 60.014,12.18 r45 top value=330
R15 "RC0402FR-075K1L" RES-0402 44.646,33.476 r0 top value=5.1k
R16 "CRCW0402330RJNED" RES-0402 60.014,13.58 r45 top value=330
R17 "CRCW04020000Z0EDC" RES-0402 13.125,31.46 r270 top value=0
R18 "CRCW04020000Z0EDC" RES-0402 11.925,31.466 r270 top value=0
R19 "RC0402FR-075K1L" RES-0402 44.646,32.376 r0 top value=5.1k
R20 "CRCW0402330RJNED" RES-0402 24.29,35.433 r180 top value=330
R21 "CRCW04020000Z0EDC" RES-0402 13,40.066 r180 top value=0
R22 "CRCW0402330RJNED" RES-0402 26.416,37.719 r0 top value=330
R23 "CRCW0402330RJNED" RES-0402 26.416,35.433 r0 top value=330
R24 "CRCW0402330RJNED" RES-0402 64.384,41.941 r270 top value=330
R25 "CRCW0402330RJNED" RES-0402 26.416,43.307 r0 top value=330
R26 "CRCW0402100KFKEDC" RES-0402 6.025,30.666 r180 top value=100k
R27 "CRCW0402330RJNED" RES-0402 60.014,14.98 r45 top value=330
R28 "CRCW0402330RJNED" RES-0402 60.014,16.38 r45 top value=330
R29 "CRCW0402330RJNED" RES-0402 60.014,17.78 r45 top value=330
R30 "CRCW0402330RJNED" RES-0402 60.014,19.18 r45 top value=330
R31 "CRCW0402330RJNED" RES-0402 60.014,20.58 r45 top value=330
R32 "CRCW0402330RJNED" RES-0402 60.014,21.98 r45 top value=330
R33 "CRCW0402330RJNED" RES-0402 60.014,23.38 r45 top value=330
R34 "CRCW0402330RJNED" RES-0402 60.014,24.78 r45 top value=330
R35 "CRCW0402100KFKEDC" RES-0402 22.925,20.8 r90 top value=100k
R36 "CRCW04020000Z0EDC" RES-0402 27.95,27.235 r180 top value=0
R37 "CRCW04020000Z0EDC" RES-0402 24.025,20.8 r90 top value=0
R38 "CRCW0402100KFKEDC" RES-0402 26.225,25.3 r270 top value=100k
R39 "CRCW04021M00FKED" RES-0402 4.55,43.853 r180 top value=1M
R40 "RC0402FR-0713K7L" RES-0402 25.125,25.3 r270 top value=13.7k
R41 "AC0402FR-07249KL" RES-0402 24.025,25.3 r270 top value=249k
R42 "CRCW04020000Z0EDC" RES-0402 24.025,23 r270 top value=0
R43 "CRCW0402100KFKEDC" RES-0402 22.925,25.3 r270 top value=100k
R44 "CRCW0402100KFKEDC" RES-0402 22.925,23 r90 top value=100k
R45 "CRCW04020000Z0EDC" RES-0402 17.046,36.576 r270 top value=0
R46 "CRCW04020000Z0EDC" RES-0402 15.946,36.576 r270 top value=0
R47 "CRCW04020000Z0EDC" RES-0402 20.346,36.576 r270 top value=0
R48 "CRCW04020000Z0EDC" RES-0402 21.446,36.576 r270 top value=0
R49 "CRCW0402100KFKEDC" RES-0402 21.596,33.276 r90 top value=100k
R50 "RC0402FR-075K1L" RES-0402 9.125,40.466 r180 top value=5.1k
R51 "RC0402FR-075K1L" RES-0402 9.125,41.66 r180 top value=5.1k
R52 "CRCW0402100KFKEDC" RES-0402 9.125,42.86 r0 top value=100k
R53 "CRCW04020000Z0EDC" RES-0402 13,37.266 r180 top value=0
R54 "CRCW04020000Z0EDC" RES-0402 12.525,39.591 r90 top value=0
R55 "CRCW04020000Z0EDC" RES-0402 12.525,36.791 r90 top value=0
R56 "CRCW0402100KFKEDC" RES-0402 6.025,31.766 r0 top value=100k
R57 "CRCW0402100KFKEDC" RES-0402 3.625,31.766 r0 top value=100k
R58 "CRCW0402100KFKEDC" RES-0402 16.825,30.966 r180 top value=100k
R59 "WF04H1003BT" RES-0402 26.416,41.021 r180 top value=100k
R60 "WF04H1372BTL" RES-0402 26.4,44.3 r0 top value=13.7k
RES "CMP-018-0004-A.4" TP-0.8MM#1 16.256,45.974 r180 top
SJ1 "SMD solder JUMPER 0805" SJ 10.825,34.066 r0 bottom
SWCLK "CMP-018-0004-A.4" TP-0.8MM#1 62.15,33.416 r315 top
SWDIO "CMP-018-0004-A.4" TP-0.8MM#1 60.65,33.416 r315 top
U1 "R7FA4M1AB3CFM#AA0" CQFP50P1200X1200X170-64L 52.75,35.853 r0 top locked
U2 "NLASB3157DFT2G" TSOP65P210X110-6N 12.525,39.266 r180 top locked
U3 "ISL854102FRZ-T" QFN0P300X400X100_HS-13L 26.825,22.1 r90 top
U4 "TXB0108DQSR" FP-DQS0020A-MFG 18.696,33.276 r90 top
U5 "SGM2205-3.3XKC3G/TR" SOT223-3 26.325,10.206 r270 top
U6 "NLASB3157DFT2G" TSOP65P210X110-6N 12.525,36.466 r180 top locked
uC_VBUS "CMP-018-0004-A.4" TP-0.8MM#1 44.646,34.576 r0 top
VBUS_CONN "CMP-018-0005-A.3" TP-1.00MM#1 8.615,36.86 r90 bottom
VCONN_TOP "CMP-018-0004-A.4" TP-0.8MM#1 9.125,35.97 r180 top
VIN_TOP "CMP-018-0004-A.4" TP-0.8MM#3 13.939,6.671 r180 top

## Footprints (in the part's own frame and the unit in brackets; to place one, negate y for a bottom-side part, rotate by r counter-clockwise, add the part's x,y. Pads: shape width x height; smd on the part's side, far side on the other; paste and mask are expansions set on the pad)
1X14-CUSTOM [mil]
  round 56 hole 33.46: 1(-700,0) 2(-600,0) 3(-500,0) 4(-400,0) 5(-300,0) 6(-200,0) 7(-100,0) 8(0,0) 9(200,0) 10(300,0) 11(400,0) 12(500,0) 13(600,0) 14(700,0)
  body extent -760,-50 759,50, height 335
1X18-CUSTOM [mil]
  round 56 hole 33.46: 1(-700,0) 2(-600,0) 3(-500,0) 4(-400,0) 5(-300,0) 6(-200,0) 7(-100,0) 8(0,0) 9(160,0) 10(260,0) 11(360,0) 12(460,0) 13(560,0) 14(660,0) 15(760,0) 16(860,0) 17(960,0) 18(1060,0)
  body extent -758,-50 1120,50, height 335
2X03 [mm]
  oct 1.501x1.501 / inner oct 1.524x1.524 / far side oct 1.501x1.501 hole 0.95: 1(2.54,1.27) 2(2.54,-1.27) 3(0,1.27) 4(0,-1.27) 5(-2.54,1.27) 6(-2.54,-1.27)
  body extent -3.81,-2.54 3.81,2.5, height 8.5
21TW-204 [mm] "Pin Header, pitch 2.54 mm, THT, Vertical, single row, 3p"
  round 1.422 hole 0.85: 1(-2.54,0) 2(0,0) 3(2.54,0)
  body extent -3.81,-1.27 3.81,1.27, height 9.5
1812 [mm] "Chip Capacitor, Body 4.5x3.2mm, IPC High Density"
  rect 1.4x3.3 smd: 1(-1.9,0) 2(1.9,0)
  body extent -2.4,-1.7 2.4,1.7, height 1.4
CAP-0402 [mm] "Chip Capacitor, 2-Leads, Body  0402 (in) 1005 (mm), IPC Medium Density"
  rrect52% 0.63x0.58 smd mask+0.05: 1(-0.435,0) 2(0.435,0)
  body extent -0.5,-0.25 0.5,0.25, height 0.5
CAP-0603 [mm] "Chip Capacitor, Body 0603 imperial,1.6x0.8mm, IPC High Density"
  rrect51% 0.87x0.97 smd mask+0.05: 1(-0.75,0) 2(0.75,0)
  body extent -0.8,-0.4 0.8,0.4, height 0.8
CAP-0805 [mm] "Chip Capacitor, Body 0805 imperial, 2.0x1.2mm, IPC Medium Density"
  rrect45% 1.11x1.47 smd mask+0.05: 1(-0.85,0) 2(0.85,0)
  body extent -1,-0.62 1,0.63, height 1.25
CQFP50P1200X1200X170-64L [mm] "CQFP, 64-Leads, Body 12,00x12,00mm, Pitch 0,50mm, IPC High Density"
  rrect50% 1.25x0.25 smd mask+0.05: 1(-5.825,3.75) 2(-5.825,3.25) 3(-5.825,2.75) 4(-5.825,2.25) 5(-5.825,1.75) 6(-5.825,1.25) 7(-5.825,0.75) 8(-5.825,0.25) 9(-5.825,-0.25) 10(-5.825,-0.75) 11(-5.825,-1.25) 12(-5.825,-1.75) 13(-5.825,-2.25) 14(-5.825,-2.75) 15(-5.825,-3.25) 16(-5.825,-3.75) 33(5.825,-3.75) 34(5.825,-3.25) 35(5.825,-2.75) 36(5.825,-2.25) 37(5.825,-1.75) 38(5.825,-1.25) 39(5.825,-0.75) 40(5.825,-0.25) 41(5.825,0.25) 42(5.825,0.75) 43(5.825,1.25) 44(5.825,1.75) 45(5.825,2.25) 46(5.825,2.75) 47(5.825,3.25) 48(5.825,3.75)
  rrect50% 0.25x1.25 smd mask+0.05: 17(-3.75,-5.825) 18(-3.25,-5.825) 19(-2.75,-5.825) 20(-2.25,-5.825) 21(-1.75,-5.825) 22(-1.25,-5.825) 23(-0.75,-5.825) 24(-0.25,-5.825) 25(0.25,-5.825) 26(0.75,-5.825) 27(1.25,-5.825) 28(1.75,-5.825) 29(2.25,-5.825) 30(2.75,-5.825) 31(3.25,-5.825) 32(3.75,-5.825) 49(3.75,5.825) 50(3.25,5.825) 51(2.75,5.825) 52(2.25,5.825) 53(1.75,5.825) 54(1.25,5.825) 55(0.75,5.825) 56(0.25,5.825) 57(-0.25,5.825) 58(-0.75,5.825) 59(-1.25,5.825) 60(-1.75,5.825) 61(-2.25,5.825) 62(-2.75,5.825) 63(-3.25,5.825) 64(-3.75,5.825)
  silkscreen extent -5.75,4.3 -5.5,4.55, body extent -6.1,-6.1 6.1,6.1, height 1.67
CX90B-16P-Footprint-1 [mm]
  rect 0.57x0.85 smd mask+0.05: A1(-3.635,1.988) A12(3.635,1.988)
  rect 0.25x0.85 smd mask+0.05: A4(-2.275,1.988) A9(2.275,1.988) B1(3.025,1.988) B4(1.825,1.988) B9(-1.825,1.988) B12(-3.025,1.988)
  rect 0.2x0.85 smd mask+0.05: A5(-1.4,1.988) A6(-0.6,1.988) A7(0.6,1.988) A8(1.4,1.988) B5(1,1.988) B6(0.2,1.988) B7(-0.2,1.988) B8(-1,1.988)
  round 0.2 hole 0.45 unplated paste-50 mask+0.2: FIXING(-3.32,0.988) FIXING(3.32,0.988)
  rect 1.71x2.6 smd paste-0.3 mask+0.05: FIXING(-1.565,-1.837) FIXING(1.565,-1.837)
  oval 1.05x2.6 hole 0.6 slot 2 at 90 deg copper offset -0.025,0 mask+0.05: SHIELD1(-4.62,1.563)
  oval 1.05x2.6 hole 0.6 slot 2 at 90 deg copper offset 0.025,0 mask+0.05: SHIELD2(4.62,1.563)
  oval 1.2x2.3 hole 0.6 slot 1.7 at 90 deg mask+0.05: SHIELD3(-4.42,-1.987) SHIELD4(4.42,-1.987)
  body extent -4.77,-4.4 4.77,2.4, height 3.17
ESP32-S3-MINI-1-N8 [mm]
  rect 0.8x0.4 smd paste-0.021 mask+0.05: 1(-7,5.95) 2(-7,5.1) 3(-7,4.25) 4(-7,3.4) 5(-7,2.55) 6(-7,1.7) 7(-7,0.85) 8(-7,0) 9(-7,-0.85) 10(-7,-1.7) 11(-7,-2.55) 12(-7,-3.4) 13(-7,-4.25) 14(-7,-5.1) 15(-7,-5.95) 31(7,-5.95) 32(7,-5.1) 33(7,-4.25) 34(7,-3.4) 35(7,-2.55) 36(7,-1.7) 37(7,-0.85) 38(7,0) 39(7,0.85) 40(7,1.7) 41(7,2.55) 42(7,3.4) 43(7,4.25) 44(7,5.1) 45(7,5.95)
  rect 0.4x0.8 smd paste-0.021 mask+0.05: 16(-5.95,-7) 17(-5.1,-7) 18(-4.25,-7) 19(-3.4,-7) 20(-2.55,-7) 21(-1.7,-7) 22(-0.85,-7) 23(0,-7) 24(0.85,-7) 25(1.7,-7) 26(2.55,-7) 27(3.4,-7) 28(4.25,-7) 29(5.1,-7) 30(5.95,-7) 46(5.95,7) 47(5.1,7) 48(4.25,7) 49(3.4,7) 50(2.55,7) 51(1.7,7) 52(0.85,7) 53(0,7) 54(-0.85,7) 55(-1.7,7) 56(-2.55,7) 57(-3.4,7) 58(-4.25,7) 59(-5.1,7) 60(-5.95,7)
  rect 1.2x1.2 smd paste-0.098 mask+0.05: 61(-1.65,-1.65) 61(-1.65,0) 61(0,1.65) 61(0,0) 61(0,-1.65) 61(1.65,-1.65) 61(1.65,0) 61(1.65,1.65)
  round 0.025 smd paste-0.103 mask+0.05: 61(-1.65,1.65)
  rect 0.8x0.8 smd paste-0.065 mask+0.05: 62(-7,7) 63(-7,-7) 64(7,-7) 65(7,7)
  TOP region: -2.25,1.05 -2.25,1.65 -1.65,2.25 -1.05,2.25 -1.05,1.05
  Keep-Out Layer region: -7.775,7.8 7.775,7.8 7.775,12.85 -7.775,12.85
  body extent -7.78,-7.8 7.77,12.85, height 2.5
"Fiducial mark 1mm with circle-Footprint-1" [mm]
  round 1 smd paste-10 mask+0.5: 1(0,0)
  TOP pour cut-out: 0,1 0.383,0.924 0.707,0.707 0.924,0.383 1,0 1,0 0.924,-0.383 0.707,-0.707 0.383,-0.924 0,-1 0,-1 -0.383,-0.924 -0.707,-0.707 -0.924,-0.383 -1,0 -1,0 -0.924,0.383 -0.707,0.707 -0.383,0.924 0,1
FP-DQS0020A-MFG [mm]
  rect 1.1x0.2 smd paste-1000 mask+0.05: 1(-0.85,1.8)
  rect 1x0.2 smd paste-1000 mask+0.05: 2(-0.9,1.4) 3(-0.9,1) 4(-0.9,0.6) 5(-0.9,0.2) 6(-0.9,-0.2) 7(-0.9,-0.6) 8(-0.9,-1) 9(-0.9,-1.4) 10(-0.9,-1.8) 11(0.9,-1.8) 12(0.9,-1.4) 13(0.9,-1) 14(0.9,-0.6) 15(0.9,-0.2) 16(0.9,0.2) 17(0.9,0.6) 18(0.9,1) 19(0.9,1.4) 20(0.9,1.8)
  silkscreen extent -1.7,1.98 -1.6,2.08, body extent -0.98,-2 1.02,2, height 0.55
L-0603 [mm] "Chip Inductor - Body 0603 imperial,1.6x0.8mm, IPC High Density"
  rrect51% 0.75x0.87 smd mask+0.05: 1(-0.71,0) 2(0.71,0)
  body extent -0.8,-0.4 0.8,0.4, height 0.8
LEDC1608X80N-AK#1 [mm]
  rrect50% 0.72x0.87 smd: A(0.725,0) C(-0.725,0)
  body extent -0.8,-0.4 0.8,0.4, height 0.79
LEDC1608X80N-AK#2 [mm]
  rrect50% 0.72x0.87 smd mask+0.05: A(0.725,0) C(-0.725,0)
  body extent -0.8,-0.4 0.8,0.4, height 0.79
PMF42 [mil]
  round 1 smd mask+1.97: 1(-68.9,0) 2(68.9,0)
  TOP region: 39.37,31.5 39.37,-31.5 98.43,-43.31 98.43,43.31
  TOP region: -39.37,31.5 -39.37,-31.5 -98.43,-43.31 -98.43,43.31
  body extent -94,-94 94,94, height 81
POWERSUPPLY_DC-21MM [mm]
  rect 2.5x4.4 hole 1 slot 2.8 at 90 deg: 1(6.2,0) 3(0,0)
  rect 4.4x2.5 hole 1 slot 2.8 at 0 deg: 2(3.05,-4.95)
  body extent -7.65,-4.85 6.75,4.55, height 3
QFN0P300X400X100_HS-13L [mm] "QFN, 12-Leads, Body 3.00x4.00mm, Pitch 0.00mm/0.50mm, Thermal Pad 1.68x3.28mm, IPC High Density"
  rrect50% 0.6x0.23 smd mask+0.05: 1(-1.4,1.25) 2(-1.4,0.75) 3(-1.4,0.25) 4(-1.4,-0.25) 5(-1.4,-0.75) 6(-1.4,-1.25) 7(1.4,-1.25) 8(1.4,-0.75) 9(1.4,-0.25) 10(1.4,0.25) 11(1.4,0.75) 12(1.4,1.25)
  rect 1.7x3.3 smd paste-50 mask+0.05: 13(0,0)
  silkscreen extent -1.67,1.87 -1.57,1.97, body extent -1.5,-2 1.5,2, height 1
RES-0402 [mm] "Chip Resistor, 2-Leads, Body  0402 (in) 1005 (mm), IPC Medium Density"
  rrect51% 0.55x0.58 smd mask+0.05: 1(-0.475,0) 2(0.475,0)
  body extent -0.5,-0.25 0.5,0.25, height 0.34
SJ [mm]
  rrect45% 1.25x1.47 smd paste-20: 1(-0.805,0) 2(0.805,0)
SM04B-SRSS-TB(LF)(SN)-Footprint-1 [mm]
  rect 0.6x1.55 smd mask+0.05: 1(1.5,-1.937) 2(0.5,-1.937) 3(-0.5,-1.937) 4(-1.5,-1.937)
  rect 1.2x1.8 smd mask+0.05: FIX(-2.8,1.938) FIX(2.8,1.938)
  body extent -3,-2.15 3,2.8, height 2.98
SOD123-1 [mm]
  rrect50% 0.91x1.22 smd: A(1.635,0) C(-1.635,0)
  silkscreen extent -0.6,-0.6 0.6,0.6, body extent -1.85,-1 1.85,1, height 1.2
SOT23 [mm]
  rrect25% 0.8x0.9 smd mask+0.05: 1(-0.95,-1) 2(0.95,-1) 3(0,1)
  body extent -1.5,-1.25 1.5,1.25, height 1.1
SOT190P230X110-4N [mm]
  rrect33% 1.01x0.91 smd paste+0 mask+0.05: 1(-0.75,-0.955)
  rrect49% 0.61x0.91 smd paste+0 mask+0.05: 2(0.95,-0.955) 3(0.95,0.955) 4(-0.95,0.955)
  silkscreen extent -1.62,-1.05 -1.52,-0.95, body extent -1.45,-1.15 1.45,1.15, height 1
SOT223-3 [mm]
  rrect50% 2x1.2 smd: 1(-3,2.3) 2(-3,0) 3(-3,-2.3)
  rrect50% 2x3.2 smd: 4(3,0)
  body extent -3.5,-3.35 3.5,3.35, height 1.8
TP-0.8MM#1 [mil]
  rrect100% 31.5x31.5 smd paste-196.85 mask+1.97: X(0,0)
TP-0.8MM#2 [mil]
  rrect100% 31.5x31.5 smd paste-196.85 mask+0: X(0,0)
TP-0.8MM#3 [mil]
  rect 23.62x31.5 smd paste-196.85 mask+1.97: X(0,0)
TP-1.00MM#1 [mm]
  rrect100% 1x1 smd paste-2.54 mask+0.05: X(0,0)
TP-1.00MM#2 [mm]
  rrect100% 1x1 smd paste-2.54: X(0,0)
TS42 [mm]
  rrect15% 1.6x1.4 smd: 1(4.2,-2.25) 2(-4.2,-2.25) 3(4.2,2.25) 4(-4.2,2.25)
  rrect15% 1.6x1.4 smd paste+0: 5(4.2,0)
  body extent -4.1,-3.25 4.1,3.25, height 2.6
TSOP65P210X110-6N [mm] "TSOP, 6-Leads, Body 2,00x1,25mm, Pitch 0,65mm, IPC Medium Density"
  rrect50% 0.66x0.3 smd mask+0.05: 1(-0.92,0.65) 2(-0.92,0) 3(-0.92,-0.65) 4(0.92,-0.65) 5(0.92,0) 6(0.92,0.65)
  silkscreen extent -1.19,1.09 -1.09,1.19, body extent -1.05,-1.1 1.05,1.1, height 1.1

## Part data
1 2 3 4 5 6 7 8 9 10 11 12 13 14 15 16 17 18 19 20 21 22 23 24 25 26 27 28 29 30 31 32 33 34 35 36 37 38 39 40 41 42 43 44 45 46 47 48 49 50 51 52 53 54 55 56 57 58 59 60 61 62 63 64 65 66 67 68 69 70 71 72 73 74 75 76 77 78 79 80 81 82 83 84 85 86 87 88 89 90 91 92 93 94 95 96: library part L0024-A.4, "LED SMD 0603 RED 625nm, water clear, 42 to 88 mcd, 120 degrees, 1.6x0.8x0.6mm", Manufacturer="Shenzen Corehy Technology", Code Arduino=L0024, Part Number=XHY-STB0603SR, Pin Count=2
3V3_IC 3V3_TOP 5V_TOP BUCK_IN_TOP CC1 CC2 D+_TOP D-_TOP ESP_DOWNLOAD_TOP ESP_EN_TOP ESP_IO1 ESP_IO4 ESP_IO5 ESP_IO6 ESP_IO7 ESP_IO8 ESP_IO9 ESP_MTCK ESP_MTDI ESP_MTDO ESP_MTMS EXT_SCL EXT_SDA MD P400_SCL P401_SDA RES SWCLK SWDIO uC_VBUS VCONN_TOP VIN_TOP: library part UT0012-A.4, "Test point 0.8mm", Design Item ID=CMP-018-0004-A.4, Pin Count=1, Source=ut.SchLib
C1: library part UT0021-A.3, Package=0402, Part Number=DNP
C2 C5 C9: library part C0054-A.16, "CAP CHIP 0603 4.7uF 10% 16V X5R", Case Code (Imperial)=0603, Dielectric=X5R, Manufacturer=Murata, Manufacturer 3="Samsung Electro-Mechanics", Part number 2=GRM188R61C475KE11D, Part number 3=CL10A475KO8NNNC, Tolerance=10%, Voltage=16V, Code Arduino=A5072, Manufacturer 2=Murata, Part Number=GRM188R61C475KAAJD, Technology=Ceramic
C3 C7 C8 C11 C12 C25 C26 C29 C30: library part C0015-A.14, "CAP CHIP 0402 100nF 10% 50V X5R", Case Code (Imperial)=0402, Dielectric=X5R, Manufacturer=Murata, Tolerance=10%, Voltage=50V, Code Arduino=A5141, Part Number=GRM155R61H104KE19D, Technology=Ceramic
C6 C20 C24: library part C0017-A.14, "CAP CHIP 0402 1uF 10% 10V X5R", Case Code (Imperial)=0402, Dielectric=X5R, Manufacturer="Samsung Electro-Mechanics", Manufacturer 2="Murata Electronics", Part number 2=GCM155C71A105KE38D, Tolerance=10%, Voltage=10V, Code Arduino=0133, Part Number=CL05A105KP5NNNC, Technology=Ceramic
C10 C13 C15 C16 C17 C18 C19 C28: library part C0111-A.7, "CAP CHIP 0805 22uF 20% 25V X5R", Case Code (Imperial)=0805, Dielectric=X5R, Manufacturer="Samsung Electro-Mechanics", Tolerance=20%, Voltage=25V, Code Arduino=C0111, Part Number=CL21A226MAQNNNE, Technology=Ceramic
C14: library part C0034-A.14, "CAP CHIP 0402 33pF 5% 50V C0G", Case Code (Imperial)=0402, Dielectric=C0G, Manufacturer=Murata, Tolerance=5%, Voltage=50V, Code Arduino=A5494, Part Number=GRM1555C1H330JA01D, Technology=Ceramic
C21: library part C0059-A.14, "CAP CHIP 0805 4.7nF 10% 1000V X7R", Case Code (Imperial)=0805, Dielectric=X7R, Manufacturer="PSA Shenzen", Manufacturer 2=KEMET, Part number 2=C0805V472KDRACTU, Part number 3=C0805C472KDRACTU, Tolerance=10%, Voltage=1kV, Code Arduino=0689, Manufacturer 3=KEMET, Part Number=FV21X472K102ECG, Technology=Ceramic
C22: library part C0007-A.15, "CAP CHIP 0402 1nF 10% 50V X7R", Case Code (Imperial)=0402, Dielectric=X7R, Manufacturer=KEMET, Tolerance=10%, Voltage=50V, Code Arduino=2321, Part Number=GRM155R71H102KA01D, Technology=Ceramic
C23: library part C0013-A.4, "CAP CHIP 0402 100pF 10% 50V C0G", Case Code (Imperial)=0402, Dielectric=C0G, Manufacturer=Yageo, Tolerance=5%, Voltage=50V, Code Arduino=C0013, Part Number=CC0402JRNPO9BN101, Technology=Ceramic
D1 D2: library part D0026-A.6, "DIODE SCHOTTKY SMD 2A 60V SOD123FL", Forward Current=2A, Forward Voltage=0.6V, Manucturer Part Number 2=SS26L, Manufacturer=Nexperia, Code Arduino=2208, Device Type="Diode Schottky", Manucturer 2=Hottech, Part Number=PMEG6020AELRX, RoHS Compliance=RoHS3
D3: library part D0025-A.5, "TVS ARRAY 4LIN.8kV 1pF SOT143B", Manufacturer=Nexperia, Code Arduino=2209, Device Type="ESD protection", Part Number=PRTR5V0U2X,215
D+ D- ESP_DOWNLOAD_BOTTOM1 ESP_EN_BOTTOM GND GND2 LOVE VBUS_CONN: library part UT0013-A.4, "Test point 1.00mm", Design Item ID=CMP-018-0005-A.3, Pin Count=1, Source=ut.SchLib
DL1 DL2 DL4: library part L0008-A.5, "LED SMD 0603 GIA588   8mcd 120^", Manufacturer=Kingbright, Code Arduino=2243, Part Number=KPT-1608YC, Pin Count=2
DL3: library part L0009-A.5, "LED SMD 0603 GREEN/568 15mcd 120^", Manufacturer=Broadcom, Code Arduino=2204, Part Number=HSMG-C190, Pin Count=2
F1: library part P0002-A.7, "PTC RESET FUSE 15V 500MA 1812 LOGO OO ARDUINO", Case Code (Imperial)=1812, Case Code (Metric)=4532, Current Rating=100A, Hold Current=500mA, Manufacturer=Bourns, Max Operating Temperature=85°C, Min Operating Temperature=-40°C, Operating Supply Voltage=15V, Package Quantity=2000, Power Dissipation=800mW, Resistance=150mR, Trip Current=1A, Approvals=UL,CSA,TUV, Case/Package=1812, Code Arduino=3335, Contact Plating=Gold, Height=0.85mm, Lead Free="Lead Free", Length=4.73mm, Max Current Rating=100A, Mount="Surface Mount,PCB", Number of Terminals=2, Packaging="Tape and Reel", Part Number=MF-MSMF050-2-W2, Radiation Hardening=No, REACH SVHC="No SVHC", Terminal Material=Gold, Termination=SMD/SMT, Time to Trip=0.15s, Voltage Rating=15V, Voltage Rating (DC)=15V, Width=3.41mm
Fiducial_1 Fiducial_2: library part UT0024-A.6
J1: library part J0272-A.3, "CONN RCPT USB3.1 TYPEC 16POS SMD", Manufacturer=Hirose, Code Arduino=J0272, Part Number=CX90B-16P
J2: library part J0005-A.2, "CONN JST 4POS SIDE 1MM TIN QWIIC", Manufacturer=JST, Code Arduino=J0005, Part Number=SM04B-SRSS-TB(LF)(SN)
J3 J6: library part J0004-A.5, "CONN Header Through Hole 6 position 0.100\" (2.54mm)", Manufacturer="Adam Tech", Code Arduino=0114, Part Number=PH2-06-UA
J5: library part J0236-A.5, "CONN PWR JACK 2.1X5.5MM SOLDER", Manufacturer=4UCON, Code Arduino=0018, Part Number=19TW-746
JANALOG: library part J0063-A.7, "CONN STRIP F/1/D 14v SER.NERA s1pin", Manufacturer=4UCONN, Code Arduino=3649, Part Number=20TW-995, Pin Count=14
JDIGITAL: library part J0035-A.10, "CONN STRIP F/1/D 18v SER.NERA s1pin", Manufacturer=4UCONN, Code Arduino=3648, Part Number=20TW-994
JOFF: library part J0184-A.7, "CONN HEADER VERT 3POS 2.54MM", Contact Resistance=20mR, Insulation Color=Black, Insulation Resistance=1GR, Manufacturer=4UCONN, Max Operating Temperature=125°C, Min Operating Temperature=-40°C, Code Arduino=J0184, Connector Type="BOARD CONNECTOR", Contact Material="Copper Alloy", Mount=Board, Number of Contacts=3, Part Number=21TW-204, Termination=Solder
L1 L2: library part I0006-A.5, "FERRITE SMD 0603 470R 1A 0.2R", Case Code (Imperial)=0603, Case Code (Metric)=1608, Current=1A, DC Resistance (DCR)=200mR, Manufacturer=Murata, Max Operating Temperature=125°C, Min Operating Temperature=-55°C, Package Quantity=1, Test Frequency=100MHz, Tolerance=25%, Code Arduino=2200, Device Type=Ferrite, Max DC Current=1A, Packaging="Tape and Reel", Part Number=BLM18PG471SN1D
L3: library part I0072-A.3, "IND 10uH 20%, max 235mR, IDC 2.3A, Isat 2.3A, shielded, max 5MHz, 4.5x4.5x1.8mm", Current=2.3A, DC Resistance (DCR)=235m, Frequency=5MHz, Inductance=10µH, Manufacturer=K-WELL, Tolerance=20%, Code Arduino=I0072, Max DC Current=2.3A, Part Number=PMF42-103MN
M1: library part M0017-A.7, "MODULE ESP32-S3 dual core 32b Xtensa LX7, WiFi 2.4GHz, BLE 5 LE, internal 8MB QSPI flash, no internal PSRAM, PCB antenna, max 85°C, 15.4x20.5x2.4mm", Manufacturer=Espressif, Code Arduino=M0017, Part Number=ESP32-S3-MINI-1-N8
PB1: library part B0005-A.8, "PUSHBUTTON SMD 6x6 5 PINS", Manufacturer="TE Connectivity", Manufacturer 2=C&K, Manufacturer Part Number 2=TS42031-160WWS027260, Code Arduino=0946, Part Number=1571636-3
Q1 Q2 Q3: library part T0004-A.7, "MOSFET N-CH 60V 300mA ESD prot. SOT23", Manufacturer="On Semiconductor", Manufacturer 2=Hottech, Manufacturer Part Number 2=2N7002K, Code Arduino=A5393, Device Type="Mosfet N-CH SMD", Part Number=2N7002KT1G, Pin Count=3
R1 R3 R26 R35 R38 R43 R44 R49 R52 R56 R57 R58: library part R0001-A.23, "RES CHIP 0402 100k 1% 1/16W", Case Code (Imperial)=0402, Manufacturer=Vishay, Power=62.5mW, Temperature Coefficient=100ppm, Tolerance=1%, Code Arduino=0134, Part Number=CRCW0402100KFKEDC, Technology="Thick film"
R2 R14 R16 R27 R28 R29 R30 R31 R32 R33 R34: library part R0017-A.21, "RES CHIP 0402 330R 5% 1/16W", Case Code (Imperial)=0402, Manufacturer=Vishay, Power=62.5mW, Temperature Coefficient=200ppm, Tolerance=5%, Code Arduino=2229, Part Number=CRCW0402330RJNED, Technology="Thick film"
R4 R5 R6 R7 R8 R9 R10 R11 R12 R13 R15 R19 R50 R51: library part R0210-A.18, "RES CHIP 0402 5k1 1% 1/16W", Case Code (Imperial)=0402, Manufacturer=YAGEO, Power=63mW, Temperature Coefficient=100ppm, Tolerance=1%, Code Arduino=R0210, Part Number=RC0402FR-075K1L, Technology="Thick film"
R17 R18 R21 R36 R37 R42 R45 R46 R47 R48 R53 R54 R55: library part R0000-A.23, "RES CHIP 0402 0R 1/16W", Case Code (Imperial)=0402, Manufacturer=Vishay, Power=62.5mW, Temperature Coefficient=0ppm, Tolerance=0%, Code Arduino=0039, Part Number=CRCW04020000Z0EDC, Technology="Thick film"
R20 R22 R23 R24 R25: library part R0017-A.23, "RES CHIP 0402 330R 5% 1/16W", Case Code (Imperial)=0402, Manufacturer=Vishay, Power=62.5mW, Temperature Coefficient=200ppm, Tolerance=5%, Code Arduino=2229, Part Number=CRCW0402330RJNED, Technology="Thick film"
R39: library part R0058-A.23, "RES CHIP 0402 1M 1% 1/16W", Case Code (Imperial)=0402, Manufacturer=Vishay, Power=62.5mW, Temperature Coefficient=100ppm, Tolerance=1%, Code Arduino=0139, Part Number=CRCW04021M00FKED, Technology="Thick film"
R40: library part R0233-A.9, "RES CHIP 0402 13k7 1% 1/16W", Case Code (Imperial)=0402, Manufacturer=YAGEO, Power=62.5mW, Temperature Coefficient=100ppm, Tolerance=1%, Code Arduino=R0233, Part Number=RC0402FR-0713K7L, Technology="Thick film"
R41: library part R0234-A.8, "RES CHIP 0402 249k 1% 1/16W", Case Code (Imperial)=0402, Manufacturer=YAGEO, Power=62.5mW, Temperature Coefficient=100ppm, Tolerance=1%, Code Arduino=R0234, Part Number=AC0402FR-07249KL, Technology="Thick film"
R59: library part R0247-A.4, "RES CHIP 0402 100k 0.1% 100ppm 1/16W", Case Code (Imperial)=0402, Manufacturer=Walsin, Power=62.5mW, Temperature Coefficient=100ppm, Tolerance=0.1%, Code Arduino=R0247, Part Number=WF04H1003BT, Technology="Thick film"
R60: library part R0248-A.3, "RES CHIP 0402 13k7 0.1% 100PPM 1/16W", Case Code (Imperial)=0402, Manufacturer=Walsin, Power=62.5mW, Temperature Coefficient=200ppm, Tolerance=0.1%, Code Arduino=R0248, Part Number=WF04H1372BTL, Technology="Thick film"
SJ1: library part UT0002-A.5, "Solder Jumper 0805 THIS IS NOT A COMPONENT", Code Arduino="This is not a component"
U1: library part U0274-A.7, "IC uC RA4M1 32b M4 48MHz 254KB flash 32KB RAM 105°C LQFP64 10x10mm", Manufacturer=Renesas, Code Arduino=U0274, Part Number=R7FA4M1AB3CFM#AA0
U2 U6: library part U0174-A.2, "IC SPDT,max 25R at VCC 4.5V tPD 1.2ns VCC 1.65V to 5V Iq max 10uA SOT363", Manufacturer="ON Semiconductor", Code Arduino=U0174, Part Number=NLASB3157DFT2G
U3: library part U0275-A.5, "IC BUCK Vin 40V Iout 1.2A 2MHz 12DFN 3x4mm", Manufacturer=Renesas, Code Arduino=U0275, Part Number=ISL854102FRZ-T
U4: library part U0276-A.5, "IC TRANSLATOR LEVEL SHIFTER BIDIR 8BIT 20SON", Manufacturer="Texas Instruments", Code Arduino=U0276, Part Number=TXB0108DQSR
U5: library part U0289-A.2, "IC LINEAR REGULATOR Vout 3V3 fixed Vin max 20V Iout max 800mA Pd 1.32W", Manufacturer=SGMICRO, Code Arduino=U0289, Part Number=SGM2205-3.3XKC3G/TR

## Free pads (board coordinates)
  round 3.2 hole 3.2 unplated paste-5 mask+0.5: MH(13.97,2.54) MH(15.24,50.8) MH(66.04,35.56)
  round 3.2 hole 3.2 unplated paste-5 mask+0.4: MH(66.04,7.62)
  round 1 smd far side paste-100 mask+0.05: NONET(18.375,44.95) NONET(20.915,44.95) NONET(20.915,47.49)
  round 0.6 hole 0.3 paste-20 mask-20: TORINO(7.024,49.881)

## Via types
v1: diameter 0.6, hole 0.3, TOP to BOTTOM, tented both sides, 316 vias

## Nets (pads, with @x,y where several pads share a name; then routed paths per layer and width w, separated by ;. In a path a pad name is that pad's centre, name@x,y a point inside that pad or via, vN(x,y) a via of type N, cw(c..) or ccw(c..) an arc to the next point about the centre after c; other vN are vias at no path point)
+3V3: 3V3_TOP.X C10.2 C11.2 C26.2 DL2.A F1.2 JANALOG.4 M1.3 R26.1 R49.2 R56.2 R58.2 U4.5 U5.3 | length 95.8
  TOP w0.15: R58.2@16.35,30.966 16.35,31.588 16.52,31.758 16.52,33.38
  TOP w0.2: R56.2@6.5,31.766 R26.1@6.5,30.666 9.088,30.666 F1.2@9.125,30.703 ; C26.2@15.796,33.711 16.189,33.711 16.52,33.38 20.8,33.38 21.171,33.751 R49.2@21.596,33.751 21.977,33.751 22.233,33.495 v1(22.279,33.495) ; U4.5@18.496,32.376 18.496,33.376 ; C11.2@19.19,10.426 19.19,11.156 19.39,11.356
  TOP w0.3: v1(23.529,32.115) 23.61,32.115 23.775,31.95 24.909,31.95 25.402,32.443 25.402,32.836 25.866,33.3 26.9,33.3 27.141,33.541 DL2.A@27.141,34.29
  TOP w0.4: 8.85,13.28 M1.3@8.85,14.5 ; 22.906,13.206 U5.3@24.025,13.206 24.025,11.475
  TOP w0.5: 15.79,11.356 17.49,11.356 C10.2@17.59,11.256 ; C10.2@17.69,11.356 19.39,11.356
  TOP w0.6: F1.2@9.125,30.703 9.125,29.788 v1(9.481,29.432)
  TOP w1: 24.025,11.475 24.307,11.193 28.315,11.193 29.409,10.099 32.501,10.099 33.4,9.2 35.1,9.2 35.56,8.74 JANALOG.4@35.56,2.54
  BOTTOM w0.4: v1(22.279,33.495) 22.317,33.457 22.613,33.457 23.069,33 23.069,32.697 23.526,32.241 23.526,31.98 23.725,31.781
  BOTTOM w0.8: v1(12.954,12.846) 13,12.8 14.449,12.8 16.751,15.102 18.886,15.102 19.633,15.849 19.633,21.837 25.442,27.646 25.442,30.064 23.725,31.781
  BOTTOM w1: v1@9.44,29.391 9.44,19.194 11.432,17.201 11.432,14.368 v1(12.954,12.846)